# Allegro board MK60_88E6071_TEST_V10A.brd
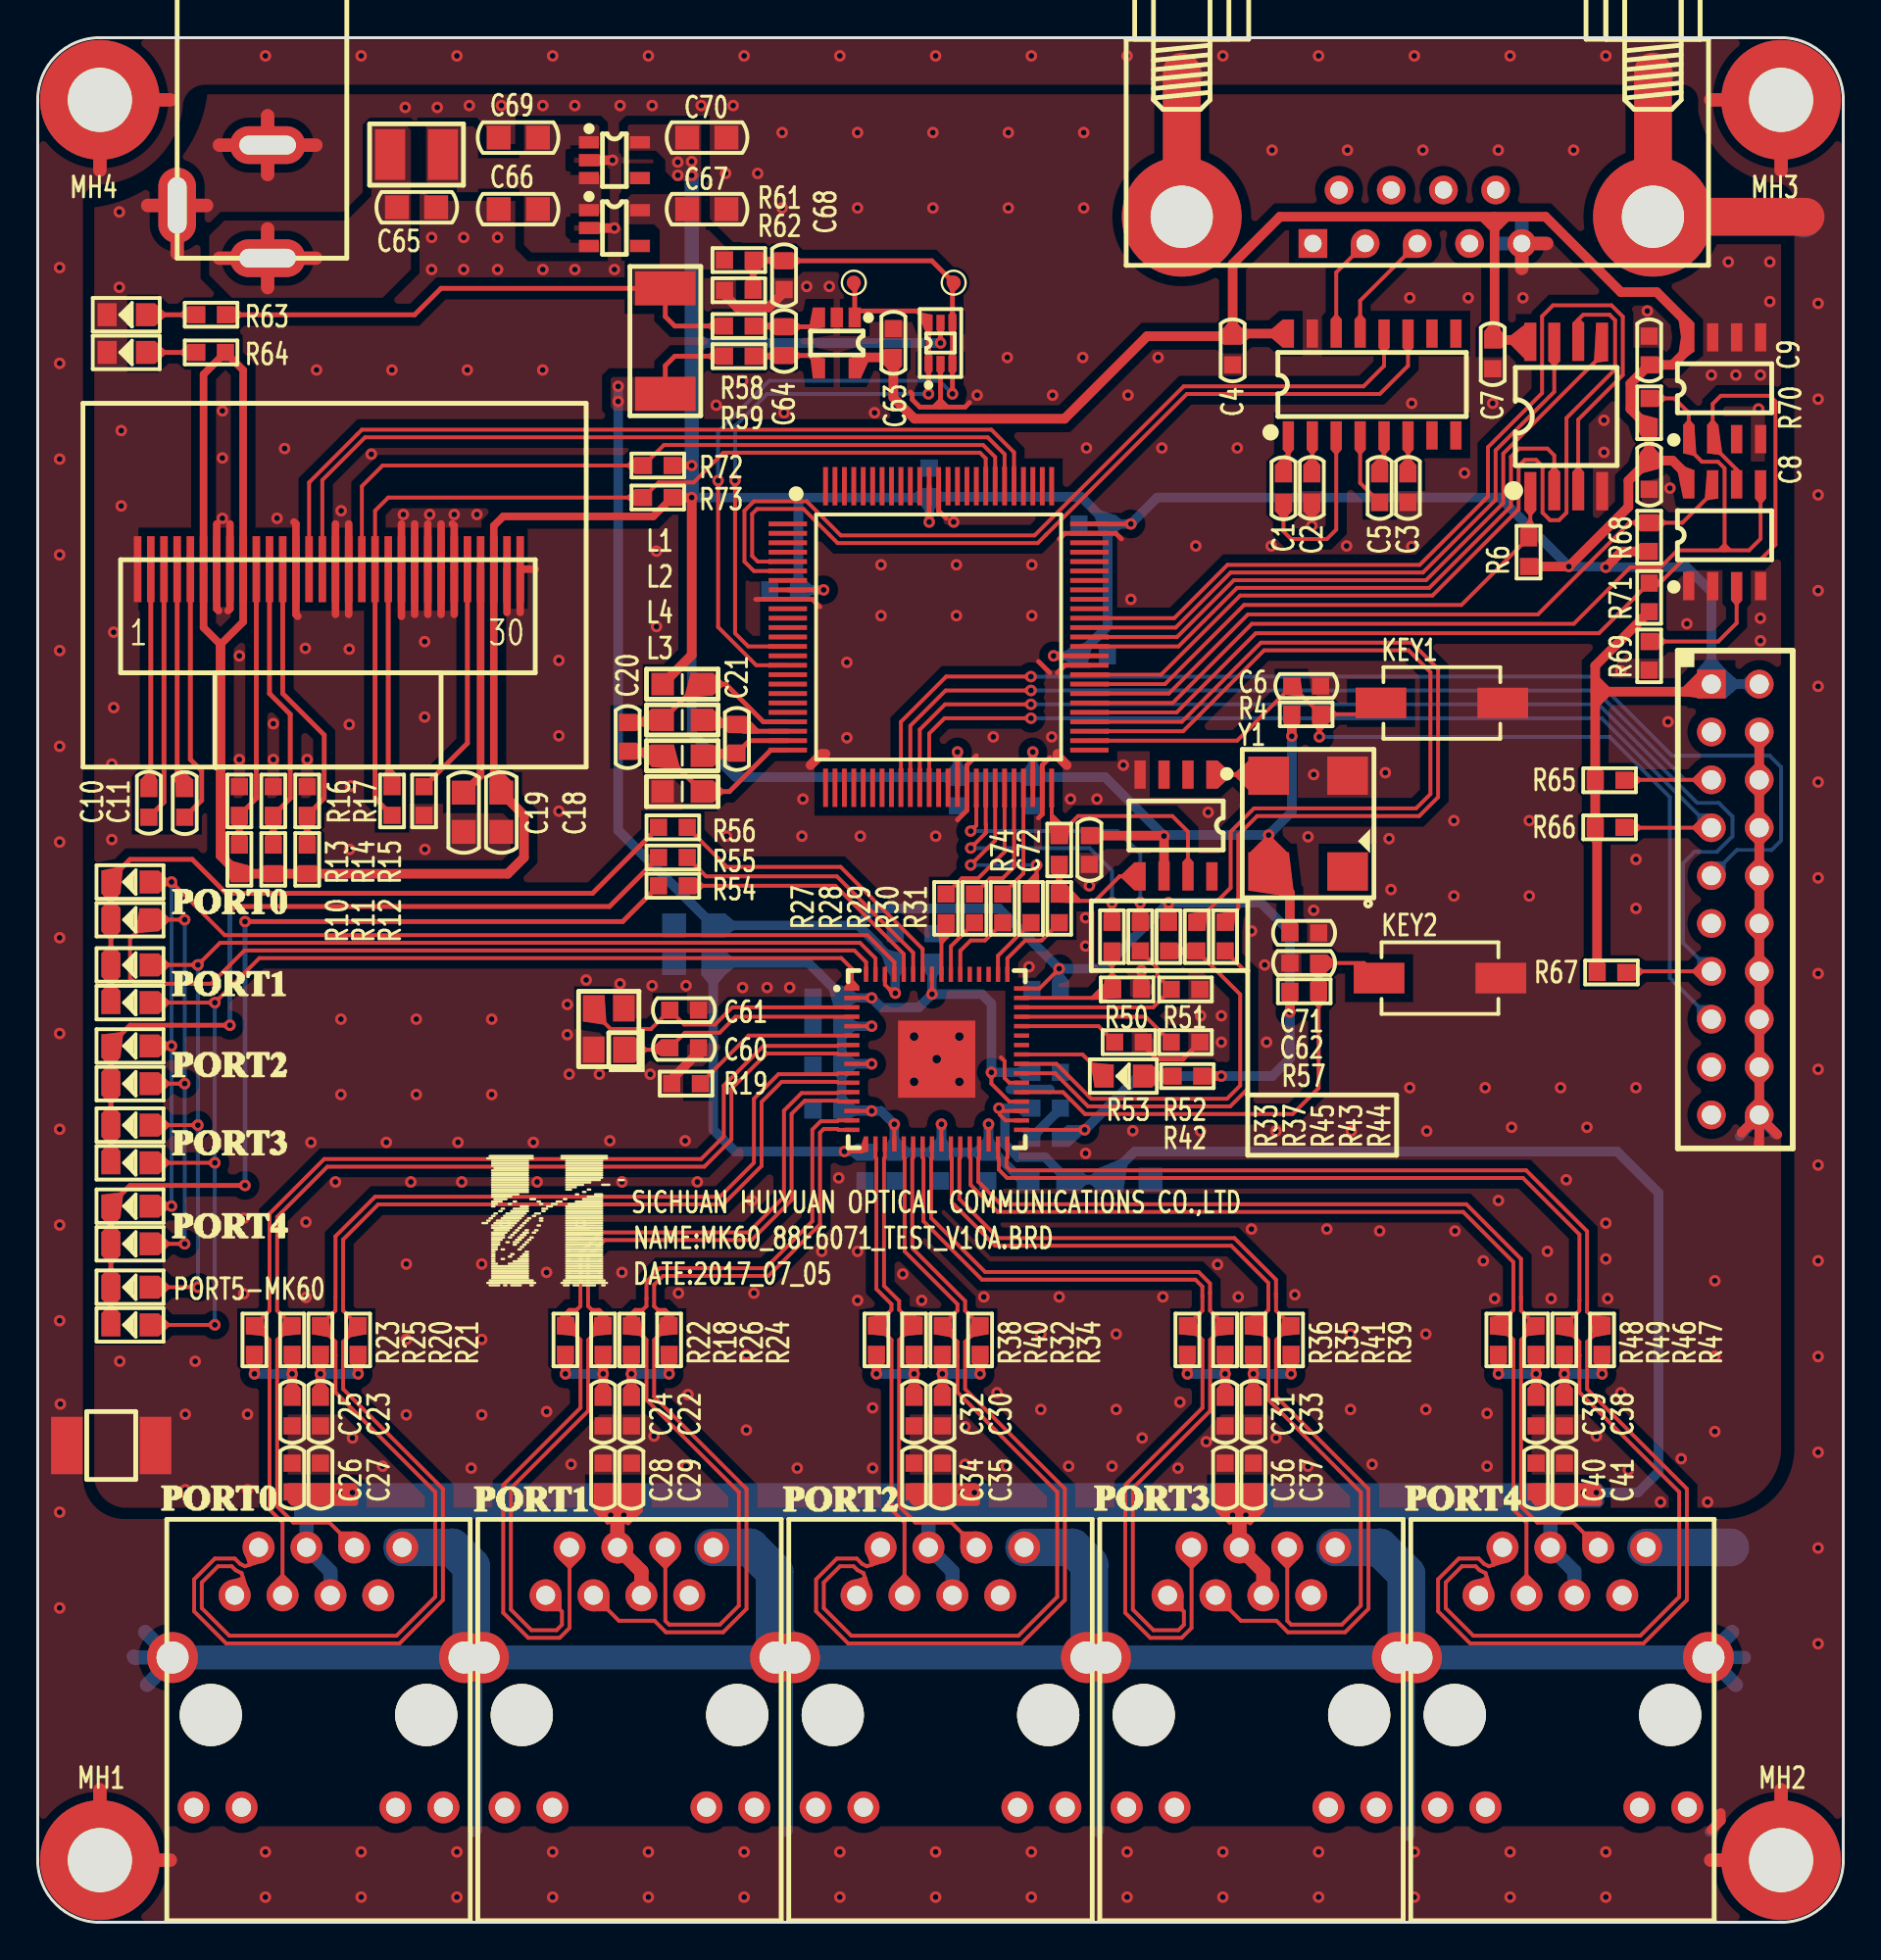
[diagram p0: board, top side]
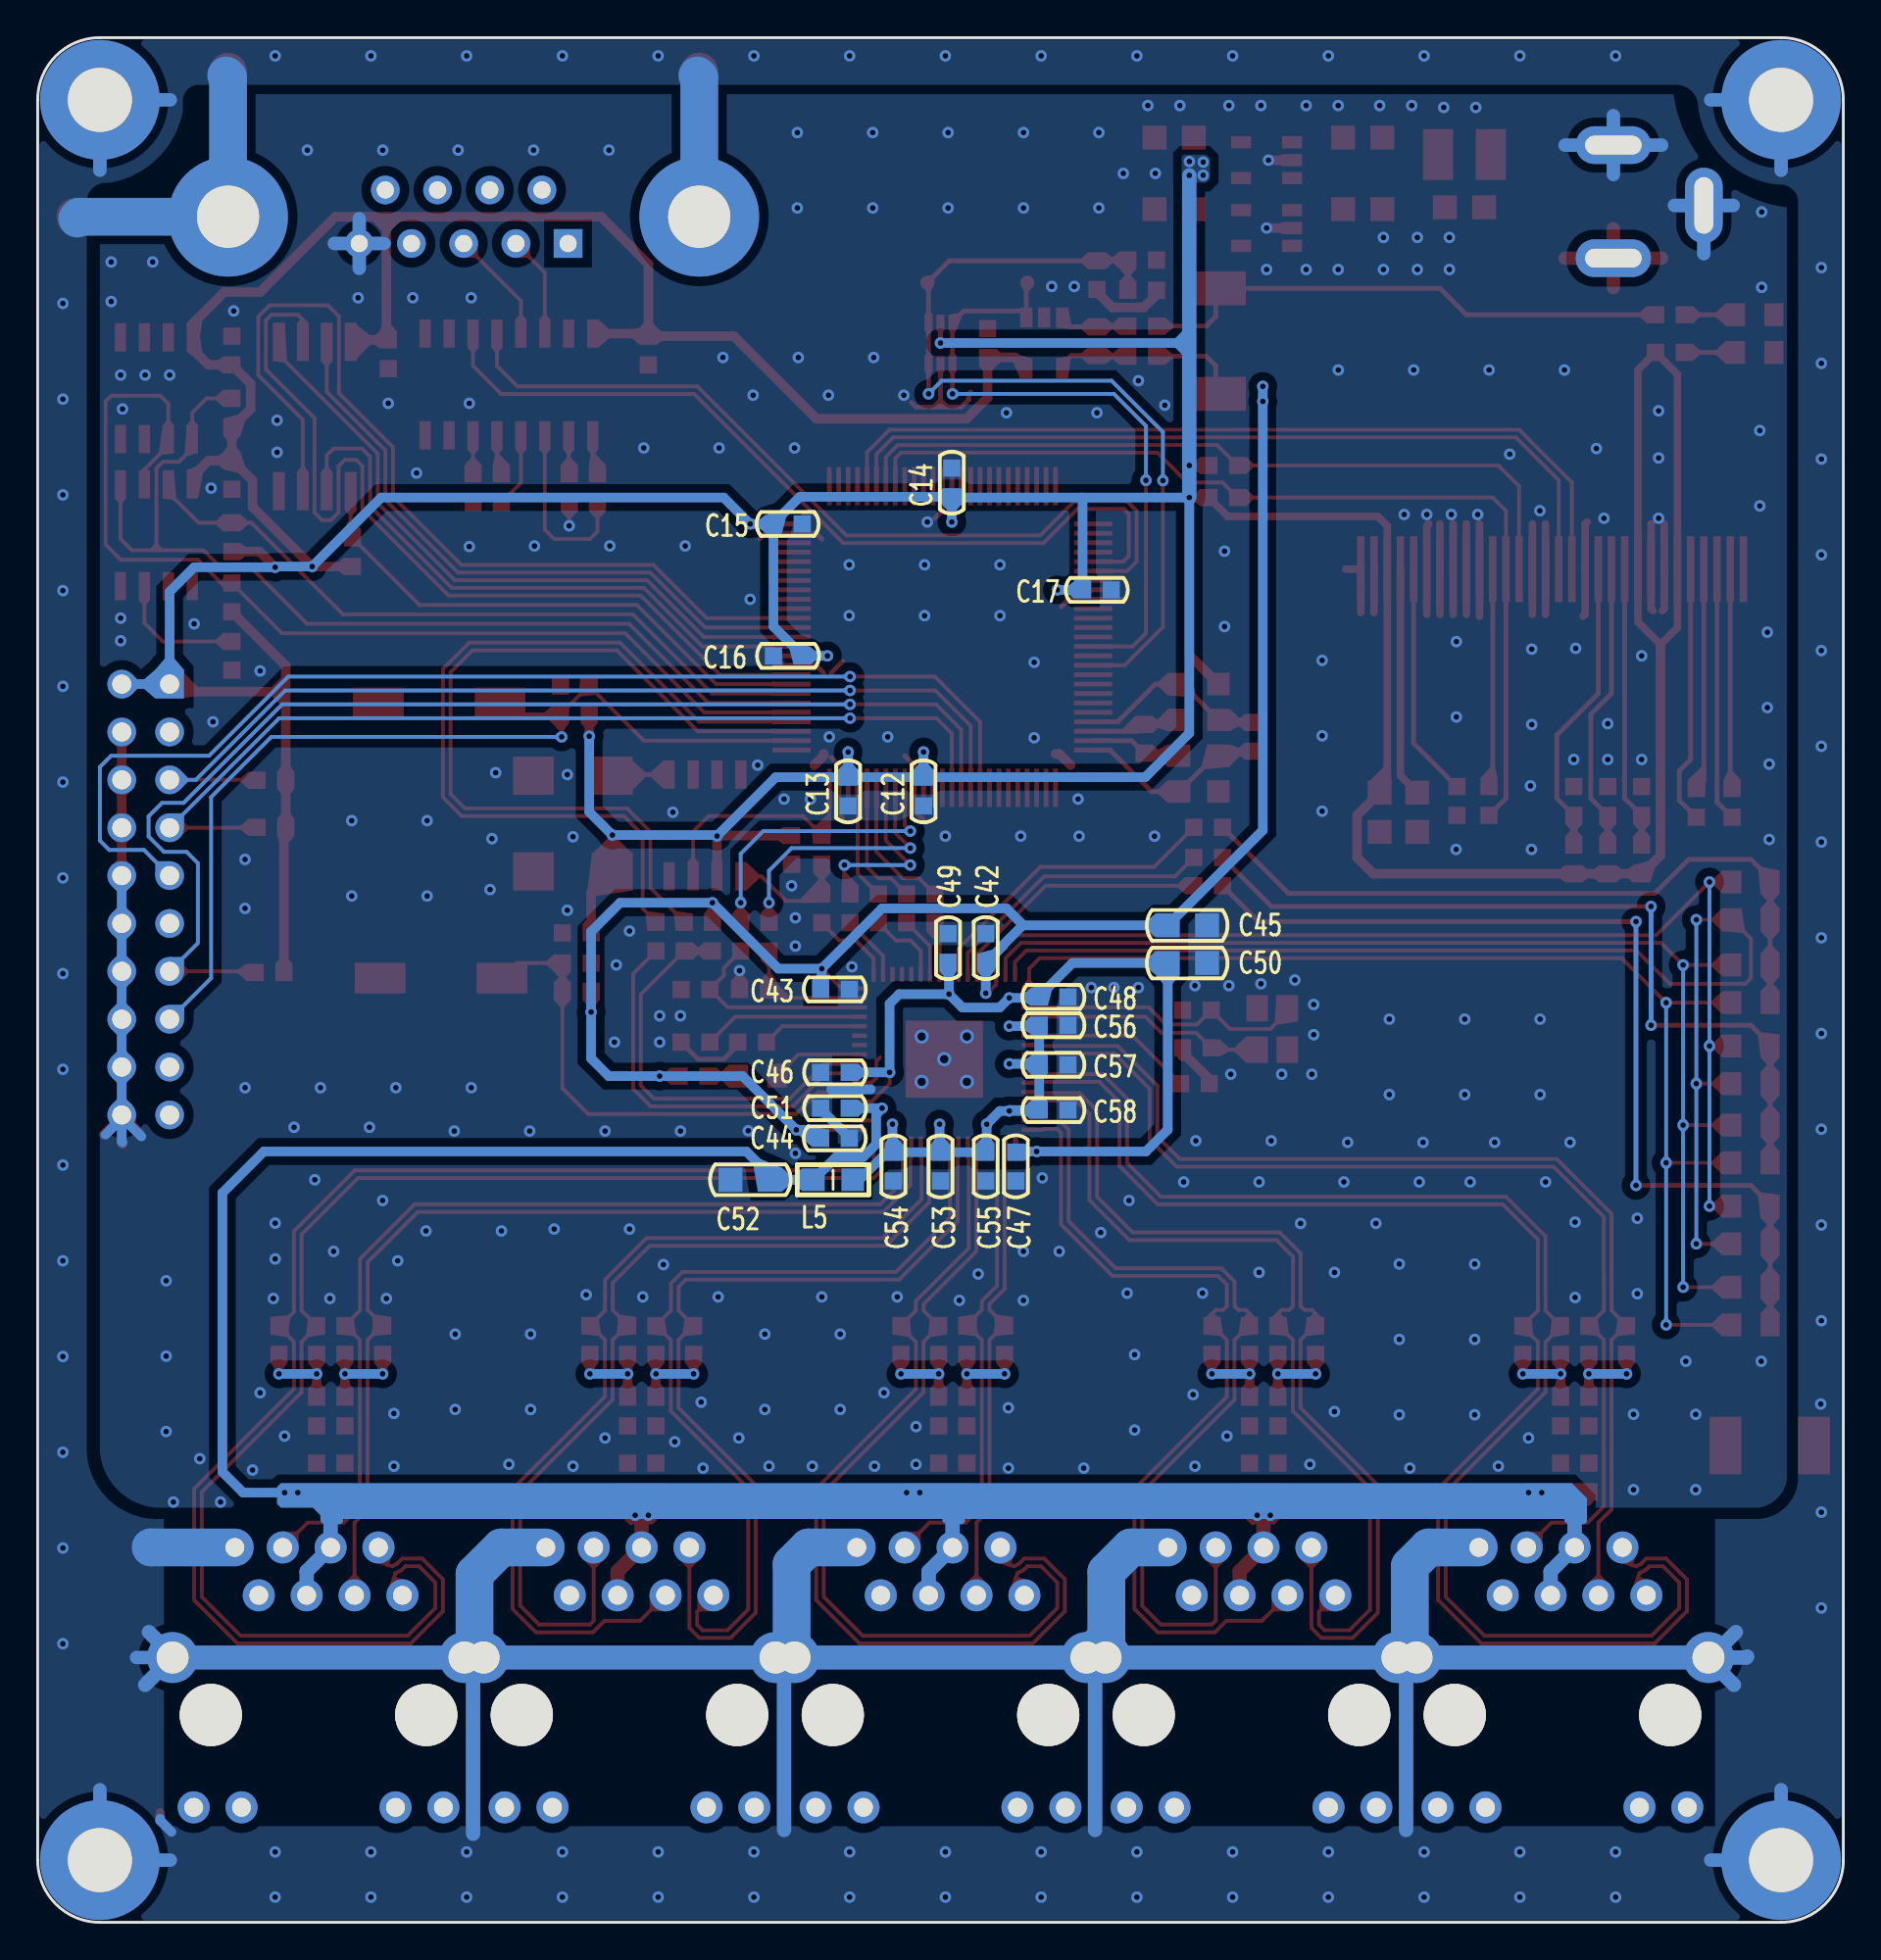
[diagram p1: board, bottom side, seen from below]

Outline 95.8 x 100 mm; copper layers: TOP, BOTTOM. Coordinates in mm from the lower left corner of the outline.
Outline path: 0,96.7 0,3.3 arc(0.97,0.97) 3.3,0 92.5,0 arc(94.83,0.97) 95.8,3.3 95.8,96.7 arc(94.83,99.03) 92.5,100 3.3,100 arc(0.97,99.03) 0,96.7

## Design rules (mm)
net group DP1: nets RXN0 RXP0
net group DP2: nets RXN1 RXP1
net group DP3: nets RXN2 RXP2
net group DP4: nets RXN3 RXP3
net group DP5: nets RXN4 RXP4
net group DP6: nets TXN0 TXP0
net group DP7: nets TXN1 TXP1
net group DP8: nets TXN2 TXP2
net group DP9: nets TXN3 TXP3
net group DP10: nets TXN4 TXP4

## Placement (name value [footprint] x y rotation side)
C1  0.1uF_50V  [CC0603]  66.1 76.1 270 top
C2  0.1uF_50V  [CC0603]  67.6 76.1 90 top
C3  0.1uF_50V  [CC0603]  72.7 76.1 90 top
C4  0.1uF_50V  [CC0603]  63.4 83.4 90 top
C5  0.1uF_50V  [CC0603]  71.2 76.1 90 top
C6  0.1uF_50V  [CC0603]  67.3 65.6 0 top
C7  0.1uF_50V  [CC0603]  77.2 83.2 90 top
C8  0.1uF_50V  [CC0603]  85.5 76.8 90 top
C9  0.1uF_50V  [CC0603]  85.5 83.4 90 top
C10  1uF_50V  [CC0603]  5.9 59.4 90 top
C11  1uF_50V  [CC0603]  7.8 59.4 270 top
C12  0.1uF_50V  [CC0603]  48.8 60 90 bottom
C13  0.1uF_50V  [CC0603]  52.8 60 90 bottom
C14  0.1uF_50V  [CC0603]  47.3 76.4 270 bottom
C15  0.1uF_50V  [CC0603]  56 74.2 0 bottom
C16  0.1uF_50V  [CC0603]  56 67.2 180 bottom
C17  0.1uF_50V  [CC0603]  39.6 70.7 0 bottom
C18  10uF_25V  [CC0805]  24.6 58.9 270 top
C19  10uF_25V  [CC0805]  22.6 58.9 270 top
C20  0.1uF_50V  [CC0603]  31.3 62.9 270 top
C21  0.1uF_50V  [CC0603]  37.1 62.8 270 top
C22  0.1uF_50V  [CC0603]  31.5 27.1 270 top
C23  0.1uF_50V  [CC0603]  15 27.1 270 top
C24  0.1uF_50V  [CC0603]  30 27.1 270 top
C25  0.1uF_50V  [CC0603]  13.5 27.1 270 top
C26  0.1uF_50V  [CC0603]  13.5 23.6 270 top
C27  1nF_50V  [CC0603]  15 23.6 270 top
C28  0.1uF_50V  [CC0603]  30 23.6 270 top
C29  1nF_50V  [CC0603]  31.5 23.6 270 top
C30  0.1uF_50V  [CC0603]  48 27.1 270 top
C31  0.1uF_50V  [CC0603]  63 27.1 270 top
C32  0.1uF_50V  [CC0603]  46.5 27.1 270 top
C33  0.1uF_50V  [CC0603]  64.5 27.1 270 top
C34  0.1uF_50V  [CC0603]  46.5 23.6 270 top
C35  1nF_50V  [CC0603]  48 23.6 270 top
C36  0.1uF_50V  [CC0603]  63 23.6 270 top
C37  1nF_50V  [CC0603]  64.5 23.6 270 top
C38  0.1uF_50V  [CC0603]  81 27.1 270 top
C39  0.1uF_50V  [CC0603]  79.5 27.1 270 top
C40  0.1uF_50V  [CC0603]  79.5 23.6 270 top
C41  1nF_50V  [CC0603]  81 23.6 270 top
C42  0.1uF_50V  [CC0603]  45.5 51.7 270 bottom
C43  0.1uF_50V  [CC0603]  53.5 49.5 0 bottom
C44  0.1uF_50V  [CC0603]  53.5 41.6 0 bottom
C45  10uF_25V  [CC0805]  34.8 52.9 0 bottom
C46  0.1uF_50V  [CC0603]  53.5 45.1 180 bottom
C47  0.1uF_50V  [CC0603]  43.9 40.1 90 bottom
C48  0.1uF_50V  [CC0603]  41.9 49.1 0 bottom
C49  0.1uF_50V  [CC0603]  47.5 51.7 270 bottom
C50  10uF_25V  [CC0805]  34.8 50.9 0 bottom
C51  0.1uF_50V  [CC0603]  53.5 43.2 180 bottom
C52  10uF_25V  [CC0805]  58 39.4 180 bottom
C53  0.1uF_50V  [CC0603]  47.9 40.1 90 bottom
C54  0.1uF_50V  [CC0603]  50.4 40.1 90 bottom
C55  0.1uF_50V  [CC0603]  45.5 40.1 90 bottom
C56  0.1uF_50V  [CC0603]  41.9 47.6 0 bottom
C57  0.1uF_50V  [CC0603]  41.9 45.5 0 bottom
C58  0.1uF_50V  [CC0603]  41.9 43.1 0 bottom
C60  20pF_50V  [CC0603]  34.3 46.4 180 top
C61  20pF_50V  [CC0603]  34.3 48.4 180 top
C62  470pF_50V  [CC0603]  67.2 50.9 180 top
C63  0.1uF_50V  [CC0603]  45.4 83.8 90 top
C64  0.1uF_50V  [CC0603]  39.6 83.9 90 top
C65  10uF_25V  [CC0805]  20.1 91 0 top
C66  10uF_25V  [CC0805]  25.5 90.9 180 top
C67  10uF_25V  [CC0805]  35.5 90.9 0 top
C68  0.1uF_50V  [CC0603]  39.6 87.4 270 top
C69  10uF_25V  [CC0805]  25.5 94.7 180 top
C70  10uF_25V  [CC0805]  35.5 94.7 0 top
C71  0.1uF_50V  [CC0603]  67.2 52.5 180 top
C72  0.1uF_50V  [CC0603]  55.8 56.9 90 top
D1  LED_GREEN  [LED0805]  57.6 44.9 180 top
D2  LED_GREEN  [LED0805]  4.9 53.2 180 top
D3  LED_GREEN  [LED0805]  4.9 48.8 180 top
D4  LED_GREEN  [LED0805]  4.9 44.5 180 top
D5  LED_GREEN  [LED0805]  4.9 40.3 180 top
D6  LED_GREEN  [LED0805]  4.9 36 180 top
D7  LED_GREEN  [LED0805]  4.9 31.7 180 top
D8  LED_GREEN  [LED0805]  4.9 55.2 180 top
D9  LED_GREEN  [LED0805]  4.9 50.8 180 top
D10  LED_GREEN  [LED0805]  4.9 46.5 180 top
D11  LED_GREEN  [LED0805]  4.9 42.3 180 top
D12  LED_GREEN  [LED0805]  4.9 38 180 top
D13  LED_GREEN  [LED0805]  4.9 33.7 180 top
D14  LED_GREEN  [LED0805]  4.7 85.3 180 top
D15  LED_GREEN  [LED0805]  4.7 83.3 180 top
DC1  -  [DC005]  12.2 94.3 270 top
F1  SMD1210-6V2A  [SMD-1210]  20.1 93.8 0 top
FB1  FBMH4532HM132-T  [L1812]  3.9 25.3 0 top
J1  -  [HEADER10X2_2R54]  88.8 65.7 270 top
J2  -  [DB9-F]  73.2 90.5 0 top
J3  -  [HR911105A]  14.9 11 180 top
J4  -  [HR911105A]  31.4 11 180 top
J5  -  [HR911105A]  64.4 11 180 top
J6  -  [HR911105A]  47.9 11 180 top
J7  -  [HR911105A]  80.9 11 180 top
KEY1  KEY  [KEY_SMD_2]  74.5 64.7 0 top
KEY2  KEY  [KEY_SMD_2]  74.4 50.1 0 top
L1  BEAD_BLM21PG600  [LC0805]  34.2 65.7 0 top
L2  BEAD_BLM21PG600  [LC0805]  34.2 63.8 0 top
L3  BEAD_BLM21PG600  [LC0805]  34.2 60 0 top
L4  BEAD_BLM21PG600  [LC0805]  34.2 61.9 0 top
L5  BEAD_BLM21PG600  [LC0805]  53.6 39.4 180 bottom
MH1  HOLD-M3  [HOLD250D134]  3.3 3.3 0 top
MH2  HOLD-M3  [HOLD250D134]  92.5 3.3 0 top
MH3  HOLD-M3  [HOLD250D134]  92.5 96.7 0 top
MH4  HOLD-M3  [HOLD250D134]  3.3 96.7 0 top
NOREF  -  []  0 0 90 top
NOREF#2  -  []  0 0 0 top
NOREF#3  -  []  0 0 0 top
NOREF#4  -  []  0 0 90 top
NOREF#5  -  []  0 0 90 top
NOREF#6  -  []  0 0 0 top
R4  10K  [RC0603]  67.3 64.1 0 top
R6  10K  [RC0603]  79.1 72.7 90 top
R10  0R/NI  [RC0603]  10.7 56.4 270 top
R11  0R  [RC0603]  12.5 56.4 270 top
R12  0R/NI  [RC0603]  14.3 56.4 270 top
R13  0R  [RC0603]  10.7 59.5 270 top
R14  0R/NI  [RC0603]  12.5 59.5 270 top
R15  0R  [RC0603]  14.3 59.5 270 top
R16  0R  [RC0603]  18.8 59.5 90 top
R17  390K  [RC0603]  20.5 59.5 90 top
R18  49.9R  [RC0603]  30 30.9 90 top
R19  4.99K  [RC0603]  34.4 44.5 0 top
R20  49.9R  [RC0603]  15 30.9 90 top
R21  49.9R  [RC0603]  17 30.9 90 top
R22  49.9R  [RC0603]  28 30.9 90 top
R23  49.9R  [RC0603]  11.5 30.9 90 top
R24  49.9R  [RC0603]  33.5 30.9 90 top
R25  49.9R  [RC0603]  13.5 30.9 90 top
R26  49.9R  [RC0603]  31.5 30.9 90 top
R27  20R  [RC0603]  48.2 53.8 90 top
R28  20R  [RC0603]  49.7 53.8 90 top
R29  20R  [RC0603]  51.2 53.8 90 top
R30  20R  [RC0603]  52.7 53.8 90 top
R31  20R  [RC0603]  54.2 53.8 90 top
R32  49.9R  [RC0603]  48 30.9 90 top
R33  20R  [RC0603]  57 52.3 90 top
R34  49.9R  [RC0603]  50 30.9 90 top
R35  49.9R  [RC0603]  63 30.9 90 top
R36  49.9R  [RC0603]  61 30.9 90 top
R37  20R  [RC0603]  58.5 52.3 90 top
R38  49.9R  [RC0603]  44.5 30.9 90 top
R39  49.9R  [RC0603]  66.5 30.9 90 top
R40  49.9R  [RC0603]  46.5 30.9 90 top
R41  49.9R  [RC0603]  64.5 30.9 90 top
R42  150R  [RC0603]  61 44.9 0 top
R43  20R  [RC0603]  61.5 52.3 90 top
R44  20R  [RC0603]  63 52.3 90 top
R45  10K  [RC0603]  60 52.3 90 top
R46  49.9R  [RC0603]  81 30.9 90 top
R47  49.9R  [RC0603]  83 30.9 90 top
R48  49.9R  [RC0603]  77.5 30.9 90 top
R49  49.9R  [RC0603]  79.5 30.9 90 top
R50  4.7K/NI  [RC0603]  57.8 49.5 0 top
R51  4.7K/NI  [RC0603]  60.9 49.5 0 top
R52  4.7K  [RC0603]  60.9 46.7 0 top
R53  4.7K/NI  [RC0603]  57.9 46.7 0 top
R54  150R  [RC0603]  33.7 55 180 top
R55  150R  [RC0603]  33.7 56.5 180 top
R56  150R  [RC0603]  33.7 58.1 180 top
R57  5.9K  [RC0603]  67.2 49.4 0 top
R58  10R  [RC0603]  37.2 84.7 180 top
R59  10R  [RC0603]  37.2 83.1 180 top
R60  0R47  [RC2512]  33.3 83.9 90 top
R61  110K  [RC0603]  37.2 88.2 180 top
R62  220K  [RC0603]  37.2 86.6 0 top
R63  2K  [RC0603]  9.2 85.3 0 top
R64  2K  [RC0603]  9.2 83.3 0 top
R65  10K  [RC0603]  83.4 60.6 0 top
R66  10K  [RC0603]  83.4 58.1 0 top
R67  10K  [RC0603]  83.5 50.4 0 top
R68  10K  [RC0603]  85.5 73.5 270 top
R69  0R  [RC0603]  85.5 67.2 90 top
R70  4.7K  [RC0603]  85.5 80.1 90 top
R71  4.7K  [RC0603]  85.5 70.3 90 top
R72  4.7K  [RC0603]  32.9 77.3 180 top
R73  4.7K  [RC0603]  32.9 75.6 180 top
R74  0R  [RC0603]  54.2 56.9 270 top
TP1  TestPoint  [TP-0R75]  43.3 87 0 top
TP2  TestPoint  [TP-0R75]  48.6 87 0 top
U1  MAX3232ESE+  [SOIC16]  70.8 81.6 0 top
U2  MK60DN512VLL10  [LQFP-100]  47.8 68.2 0 top
U3  AT24C512C-SSHM-T/NI  [SOIC8]  89.5 73.6 0 top
U4  W25Q128FVSIG  [SOIC-8_208]  81.1 79.9 0 top
U5  TMP75AIDR  [SOIC8]  89.5 81.4 0 top
U6  -  [OLED_0R96]  2.4 61.3 0 top
U7  88E6071-xx-NNC2I000  [QFN-64]  47.7 45.8 270 top
U8  X322525MSB4SI  [X-4P-3R2X2R5-SMD]  30.3 47.4 90 top
U9  INA193AIDBVT  [SOT23-5]  42.4 83.8 180 top
U10  NUP4202W1T2G  [SC-88]  47.9 83.8 90 top
U11  SPX3819M5-L-3-3/TR  [SOT23-5]  30.6 89.9 270 top
U12  SPX3819M5-L-3-3/TR  [SOT23-5]  30.6 93.5 270 top
U13  CY2305SXI-1HT/NI  [SOIC8]  60.4 58.2 180 top
Y1  SG7050CAN-50M-TJGA/NI  [OSC7X5]  67.4 58.3 90 top

## Library data of the parts
C1-C6 C62 = CAP NP
C7-C58 C60 C61 C63-C72 = CAP NP_2
D1-D15 = LED_4
DC1 = DC005
F1 = FUSE
FB1 = FB
J1 = CON20_0
J2 = DB9-F_0
J3-J7 = CON_RJ45_1X8_F_RA_0
KEY1 KEY2 = SW PUSHBUTTON_0
L1-L5 = IND_BEAD_0805_600OHM_1
MH1-MH4 = Hold_1
R4 R6 R10-R74 = R_Generic
TP1 TP2 = TestPoint
U1 = ADM202_0
U2 = MK60DN512VLL10_4
U3 = TMP_0
U4 = CEIT_C5000_0
U5 = TMP75AIDR_0
U6 = OLED_0
U7 = 88E6071-xx-NNC2I000
U8 = TSX-3225
U9 = 74AHC1G08_1
U10 = nup2202w1_D_2
U11 U12 = SPX3819M5-L-1-2
U13 = CY2305C_0
Y1 = SMD_OSC_5

## Footprints (pads in the part's own frame, mm; a bottom-side part is the same pattern mirrored in y, then rotated)
CC0603
  rect 0.914x0.914 smd: 1(-0.762,0) 2(0.762,0)
CC0805
  rect 1.27x1.27 smd: 1(-1.041,0) 2(1.041,0)
DB9-F
  rect 1.524x1.524 hole 0.914: 1(-5.54,-1.42)
  round 1.524 hole 0.914: 2(-2.77,-1.42) 3(0,-1.42) 4(2.77,-1.42) 5(5.54,-1.42) 6(-4.155,1.42) 7(-1.385,1.42) 8(1.385,1.42) 9(4.155,1.42)
  round 6.35 hole 3.302: 10(12.5,0) 11(-12.5,0)
DC005
  oval 2x4 hole 1x3: 1(6,0) 2(0,0)
  oval 4x2 hole 3x1: 3(3.2,-4.8)
HEADER10X2_2R54
  rect 1.524x1.524 hole 1.016: 1(0,0)
  round 1.524 hole 1.016: 2(0,2.54) 3(2.54,0) 4(2.54,2.54) 5(5.08,0) 6(5.08,2.54) 7(7.62,0) 8(7.62,2.54) 9(10.16,0) 10(10.16,2.54) 11(12.7,0) 12(12.7,2.54) 13(15.24,0) 14(15.24,2.54) 15(17.78,0) 16(17.78,2.54) 17(20.32,0) 18(20.32,2.54) 19(22.86,0) 20(22.86,2.54)
HOLD250D134
  round 6.35 hole 3.404: 1(0,0)
HR911105A
  round 3.3 hole 3.3 unplated: (-5.715,0) (5.715,0)
  round 1.699 hole 1.001: 1(4.45,-6.35) 2(3.18,-8.89) 3(1.91,-6.35) 4(0.64,-8.89) 5(-0.63,-6.35) 6(-1.9,-8.89) 7(-3.17,-6.35) 8(-4.44,-8.89) 9(6.625,4.9) 10(4.085,4.9) 11(-4.085,4.9) 12(-6.625,4.9)
  round 2.7 hole 1.7: 13(7.745,-3.05) 14(-7.745,-3.05)
KEY_SMD_2
  rect 2.692x1.626 smd: 1(-3.23,0) 2(3.23,0)
L1812
  rect 1.676x3.048 smd: 1(-2.349,0) 2(2.349,0)
LC0805
  rect 1.194x1.194 smd: 1(-1.041,0) 2(1.041,0)
LED0805
  rect 1.016x1.219 smd: 1(-1.016,0) 2(1.016,0)
LQFP-100
  rect 2.032x0.254 smd: 1(-8,6) 2(-8,5.5) 3(-8,5) 4(-8,4.5) 5(-8,4) 6(-8,3.5) 7(-8,3) 8(-8,2.5) 9(-8,2) 10(-8,1.5) 11(-8,1) 12(-8,0.5) 13(-8,0) 14(-8,-0.5) 15(-8,-1) 16(-8,-1.5) 17(-8,-2) 18(-8,-2.5) 19(-8,-3) 20(-8,-3.5) 21(-8,-4) 22(-8,-4.5) 23(-8,-5) 24(-8,-5.5) 25(-8,-6) 51(8,-6) 52(8,-5.5) 53(8,-5) 54(8,-4.5) 55(8,-4) 56(8,-3.5) 57(8,-3) 58(8,-2.5) 59(8,-2) 60(8,-1.5) 61(8,-1) 62(8,-0.5) 63(8,0) 64(8,0.5) 65(8,1) 66(8,1.5) 67(8,2) 68(8,2.5) 69(8,3) 70(8,3.5) 71(8,4) 72(8,4.5) 73(8,5) 74(8,5.5) 75(8,6)
  rect 0.254x2.032 smd: 26(-6,-8) 27(-5.5,-8) 28(-5,-8) 29(-4.5,-8) 30(-4,-8) 31(-3.5,-8) 32(-3,-8) 33(-2.5,-8) 34(-2,-8) 35(-1.5,-8) 36(-1,-8) 37(-0.5,-8) 38(0,-8) 39(0.5,-8) 40(1,-8) 41(1.5,-8) 42(2,-8) 43(2.5,-8) 44(3,-8) 45(3.5,-8) 46(4,-8) 47(4.5,-8) 48(5,-8) 49(5.5,-8) 50(6,-8) 76(6,8) 77(5.5,8) 78(5,8) 79(4.5,8) 80(4,8) 81(3.5,8) 82(3,8) 83(2.5,8) 84(2,8) 85(1.5,8) 86(1,8) 87(0.5,8) 88(0,8) 89(-0.5,8) 90(-1,8) 91(-1.5,8) 92(-2,8) 93(-2.5,8) 94(-3,8) 95(-3.5,8) 96(-4,8) 97(-4.5,8) 98(-5,8) 99(-5.5,8) 100(-6,8)
OLED_0R96
  rect 0.4x3.5 smd: 1(2.9,10.5) 2(3.6,10.5) 3(4.3,10.5) 4(5,10.5) 5(5.7,10.5) 6(6.4,10.5) 7(7.1,10.5) 8(7.8,10.5) 9(8.5,10.5) 10(9.2,10.5) 11(9.9,10.5) 12(10.6,10.5) 13(11.3,10.5) 14(12,10.5) 15(12.7,10.5) 16(13.4,10.5) 17(14.1,10.5) 18(14.8,10.5) 19(15.5,10.5) 20(16.2,10.5) 21(16.9,10.5) 22(17.6,10.5) 23(18.3,10.5) 24(19,10.5) 25(19.7,10.5) 26(20.4,10.5) 27(21.1,10.5) 28(21.8,10.5) 29(22.5,10.5) 30(23.2,10.5)
OSC7X5
  rect 2.032x2.159 smd: 1(-2.54,-2.1) 2(2.54,-2.1) 3(2.54,2.091) 4(-2.54,2.091)
QFN-64
  rect 0.23x0.8 smd: 1(-3.75,-4.5) 2(-3.25,-4.5) 3(-2.75,-4.5) 4(-2.25,-4.5) 5(-1.75,-4.5) 6(-1.25,-4.5) 7(-0.75,-4.5) 8(-0.25,-4.5) 9(0.25,-4.5) 10(0.75,-4.5) 11(1.25,-4.5) 12(1.75,-4.5) 13(2.25,-4.5) 14(2.75,-4.5) 15(3.25,-4.5) 16(3.75,-4.5) 33(3.75,4.5) 34(3.25,4.5) 35(2.75,4.5) 36(2.25,4.5) 37(1.75,4.5) 38(1.25,4.5) 39(0.75,4.5) 40(0.25,4.5) 41(-0.25,4.5) 42(-0.75,4.5) 43(-1.25,4.5) 44(-1.75,4.5) 45(-2.25,4.5) 46(-2.75,4.5) 47(-3.25,4.5) 48(-3.75,4.5)
  rect 0.8x0.23 smd: 17(4.5,-3.75) 18(4.5,-3.25) 19(4.5,-2.75) 20(4.5,-2.25) 21(4.5,-1.75) 22(4.5,-1.25) 23(4.5,-0.75) 24(4.5,-0.25) 25(4.5,0.25) 26(4.5,0.75) 27(4.5,1.25) 28(4.5,1.75) 29(4.5,2.25) 30(4.5,2.75) 31(4.5,3.25) 32(4.5,3.75) 49(-4.5,3.75) 50(-4.5,3.25) 51(-4.5,2.75) 52(-4.5,2.25) 53(-4.5,1.75) 54(-4.5,1.25) 55(-4.5,0.75) 56(-4.5,0.25) 57(-4.5,-0.25) 58(-4.5,-0.75) 59(-4.5,-1.25) 60(-4.5,-1.75) 61(-4.5,-2.25) 62(-4.5,-2.75) 63(-4.5,-3.25) 64(-4.5,-3.75)
  rect 4.1x4.1 smd: 65(0,0)
RC0603
  rect 0.914x0.914 smd: 1(-0.762,0) 2(0.762,0)
RC2512
  rect 1.8x3.2 smd: 1(-2.8,0) 2(2.8,0)
SC-88
  rect 0.813x0.432 smd: 1(-1.092,0.635) 2(-1.092,0) 3(-1.092,-0.635) 4(1.092,-0.635) 5(1.092,0) 6(1.092,0.635)
SMD-1210
  rect 1.6x2.7 smd: 1(-1.4,0) 2(1.4,0)
SOIC8
  rect 0.6x1.5 smd: 1(-1.9,-2.7) 2(-0.63,-2.7) 3(0.64,-2.7) 4(1.91,-2.7) 5(1.91,2.7) 6(0.64,2.7) 7(-0.63,2.7) 8(-1.9,2.7)
SOIC16
  rect 0.6x1.5 smd: 1(-4.445,-2.7) 2(-3.175,-2.7) 3(-1.905,-2.7) 4(-0.635,-2.7) 5(0.635,-2.7) 6(1.905,-2.7) 7(3.175,-2.7) 8(4.445,-2.7) 9(4.445,2.7) 10(3.175,2.7) 11(1.905,2.7) 12(0.635,2.7) 13(-0.635,2.7) 14(-1.905,2.7) 15(-3.175,2.7) 16(-4.445,2.7)
SOIC-8_208
  rect 0.635x2.032 smd: 1(-1.905,-3.962) 2(-0.635,-3.962) 3(0.635,-3.962) 4(1.905,-3.962) 5(1.905,3.962) 6(0.635,3.962) 7(-0.635,3.962) 8(-1.905,3.962)
SOT23-5
  rect 0.65x1.06 smd: 1(-0.95,-1.354) 2(0,-1.354) 3(0.95,-1.354) 4(0.95,1.354) 5(-0.95,1.354)
TP-0R75
  round 0.75 smd: 1(0,0)
X-4P-3R2X2R5-SMD
  rect 1.4x1.15 smd: 1(-1.1,-0.8) 2(1.1,-0.8) 3(1.1,0.8) 4(-1.1,0.8)

## Nets
GND: C2.1 C3.1 C4.1 C6.2 C7.1 C8.1 C9.2 C12.1 C13.1 C14.1 C15.1 C16.1 C17.1 C18.2 C19.2 C22.2 C23.2 C24.2 C25.2 C26.1 C27.1 C28.1 C29.1 C30.2 C31.2 C32.2 C33.2 C34.1 C35.1 C36.1 C37.1 C38.2 C39.2 C40.1 C41.1 C42.1 C43.1 C44.1 C45.1 C46.1 C47.1 C48.1 C49.1 C50.1 C51.1 C52.1 C53.1 C54.1 C55.1 C56.1 C57.1 C58.1 C60.1 C61.1 C62.2 C63.2 C65.2 C66.2 C67.2 C68.2 C69.2 C70.2 C71.1 C72.1 D14.2(CATHODE) D15.2(CATHODE) DC1.2 DC1.3 FB1.2 J1.4 J1.6 J1.8 J1.10 J1.12 J1.14 J1.16 J1.18 J1.20 J2.5 KEY1.2 KEY2.2 L3.1(A) R13.1 R14.1 R15.1 R17.1 R19.1 R50.2 R51.2 R52.2 R53.2 R62.1 R69.1 U1.15(GND) U2.9(VSS_1) U2.41(VSS_2) U2.49(VSS_3) U2.60(VSS_4) U2.74(VSS_5) U2.88(VSS_6) U3.1(A0) U3.2(A1) U3.4(GND) U4.4(GND) U5.4(GND) U5.5(A2) U5.6(A1) U5.7(A0) U6.1(NC(GND)_1) U6.7(NC) U6.8(VSS) U6.13(CS#) U6.16(R/W#) U6.17(E/RD#) U6.21(D3) U6.22(D4) U6.23(D5) U6.24(D6) U6.25(D7) U6.29(VLSS) U6.30(NC(GND)_2) U7.38(VSS) U7.65(GND) U8.2(GND1) U8.4(GND2) U9.2(GND) U10.2 U11.2(GND) U12.2(GND) U13.4(GND) Y1.2(GND)
GND_EARTH: FB1.1 J2.10 J2.11 J3.8 J3.13(EG2) J3.14(EG1) J4.8 J4.13(EG2) J4.14(EG1) J5.8 J5.13(EG2) J5.14(EG1) J6.8 J6.13(EG2) J6.14(EG1) J7.8 J7.13(EG2) J7.14(EG1) MH1.1 MH2.1 MH3.1 MH4.1
VCC_3.3V: C4.2 C7.2 C8.2 C9.1 C12.2 C13.2 C14.2 C15.2 C16.2 C17.2 C18.1 C63.1 C70.1 C71.2 C72.2 J1.1 J1.2 L1.1(A) R4.1 R6.1 R10.2 R11.2 R12.2 R64.2 R65.1 R66.1 R67.1 R68.2 R70.1 R71.1 R72.1 R73.1 U1.16(VCC) U2.8(VDD_1) U2.40(VDD_2) U2.48(VDD_3) U2.61(VDD_4) U2.75(VDD_5) U2.89(VDD_6) U3.8(VCC) U4.8(VCC) U5.8(V+) U6.6(VBAT) U6.9(VDD) U6.28(VCC) U9.5(V+) U10.5 U12.5(VOUT) U13.6(VDD) Y1.4(VCC)
VCC_3.3V_OUT: C67.1 R58.2 R60.2 R61.2 R63.2 U11.5(VOUT)
VCC_3.3V_SWITCH: C42.2 C43.2 C44.2 C45.2 R42.2 R45.2 R57.1 R59.2 R60.1 U7.33(VDD33) U7.48(P5_VDDO) U7.62(EE_VDDO)
VCC_5V: C65.1 DC1.1 F1.1
VDDA3V3: C20.1 L1.2(B) L2.1(A) U2.22(VDDA)
VSSA: C20.2 L3.2(B) L4.1(A) U2.25(VSSA)
BS0: R10.1 R13.2 U6.10(BS0)
BS1: R11.1 R14.2 U6.11(BS1)
BS2: R12.1 R15.2 U6.12(BS2)
C0_LED: D8.1(ANODE) D10.1(ANODE) D12.1(ANODE) U7.61(EE_DIN/C0_LED/EEE)
C1_LED: D9.1(ANODE) D11.1(ANODE) D13.1(ANODE) U7.63(EE_CLK/C1_LED/FLOW)
C2_LED: D2.1(ANODE) D4.1(ANODE) D6.1(ANODE) U7.64(EE_CS/C2_LED/EE_WE)
C3_LED: D3.1(ANODE) D5.1(ANODE) D7.1(ANODE) U7.1(EE_DOUT/C3_LED)
CLK_50M: R31.2 R74.2 U13.5(CLK3)
CLK_50M_MK60: R74.1 U2.50(PTA18) U13.7(CLK4)
D/C#: U2.81(PTC9) U6.15(D/C#)
E6071_AVDD_1.8V: C53.2 C54.2 C55.2 C56.2 C57.2 C58.2 L5.2(B) U7.5(AVDD) U7.9(P0_AVDD) U7.14(P1_AVDD) U7.20(P2_AVDD) U7.25(P3_AVDD) U7.30(P4_AVDD)
E6071_CT_1.8V: C26.2 C27.2 C28.2 C29.2 C34.2 C35.2 C36.2 C37.2 C40.2 C41.2 C51.2 C52.2 J3.4 J3.5 J4.4 J4.5 J5.4 J5.5 J6.4 J6.5 J7.4 J7.5 L5.1(A) U7.34(VDD18(OUT)) U7.35(VDD18(IN))
E6071_VDD_CORE_1.2V: C46.2 C47.2 C48.2 C49.2 C50.2 U7.2(VDD_CORE_1) U7.17(VDD_CORE_2) U7.36(VDD_CORE(OUT&IN)) U7.57(VDD_CORE_3)
I2C0_PROT: R68.1 U2.57(PTB9) U3.7(WP)
I2C0_SCLK: R71.2 U2.55(PTB2) U3.6(SCL) U5.2(SCL)
I2C0_SDATA: R70.2 U2.56(PTB3) U3.5(SDA) U5.1(SDA)
I2C1_SCL: R72.2 U2.82(PTC10) U6.18(D0)
I2C1_SDA: R16.1 R73.2 U2.83(PTC11/LLWU_P11) U6.19(D1)
INTN: D1.2(CATHODE) U7.41(INTN)
JTAG_TCLK: J1.9 U2.34(PTA0)
JTAG_TDI: J1.5 R65.2 U2.35(PTA1)
JTAG_TDO: J1.13 R67.2 U2.36(PTA2)
JTAG_TMS: J1.7 R66.2 U2.37(PTA3)
MDC: R44.1 U7.39(MDC_CPU)
MDIO: R43.1 R45.1 U7.40(MDIO_CPU)
P5_ID0: R28.1 U7.55(P5_IND0/P5_ID0)
P5_ID1: R29.1 U7.54(P5_IND1/P5_ID1)
P5_INDV: R27.1 U7.56(P5_INDV/P5_ICTL)
P5_MODE0: R33.1 R50.1 U7.47(P5_OUTD0/P5_OD0/P5_MODE0)
P5_MODE1: R37.1 R51.1 U7.46(P5_OUTD1/P5_OD1/P5_MODE1)
P5_MODE2: R52.1 U7.45(P5_OUTD2/P6_OD0/P5_MDDE2)
P5_MODE3: R53.1 U7.44(P5_OUTD3/P6_OD1/P5_MODE3)
P5_OUTCLK: R31.1 U7.49(P5_OUTCLK/P5_REFCLK)
P5_OUTDV: R30.1 U7.50(P5_OUTEN/P5_OCTL/P5_SEL)
R0_LED: R56.1 U7.58(R0_LED/ADDR4)
R1_LED: R55.1 U7.59(R1_LED/NO_CPU)
R2_LED: R54.1 U7.60(R2_LED)
RES#: U2.80(PTC8) U6.14(RES#)
RESETN: C62.1 KEY2.1 R57.2 U7.37(RESETN)
RMII0_CRS_DV: R30.2 U2.44(PTA14)
RMII0_MDC: R44.2 U2.54(PTB1)
RMII0_MDIO: R43.2 U2.53(PTB0/LLWU_P5)
RMII0_RXD0: R33.2 U2.43(PTA13/LLWU_P4)
RMII0_RXD1: R37.2 U2.42(PTA12)
RMII0_TXD0: R28.2 U2.46(PTA16)
RMII0_TXD1: R29.2 U2.47(PTA17)
RMII0_TXEN: R27.2 U2.45(PTA15)
RXN0: J3.6(RXN1) R25.2 U7.8(P0_RXN)
RXN1: J4.6(RXN1) R26.2 U7.15(P1_RXN)
RXN2: J6.6(RXN1) R40.2 U7.19(P2_RXN)
RXN3: J5.6(RXN1) R41.2 U7.26(P3_RXN)
RXN4: J7.6(RXN1) R49.2 U7.29(P4_RXN)
RXP0: J3.3(RXP1) R23.2 U7.7(P0_RXP)
RXP1: J4.3(RXP1) R24.2 U7.16(P1_RXP)
RXP2: J6.3(RXP1) R38.2 U7.18(P2_RXP)
RXP3: J5.3(RXP1) R39.2 U7.27(P3_RXP)
RXP4: J7.3(RXP1) R48.2 U7.28(P4_RXP)
SYS_RESET#: C6.1 J1.15 KEY1.1 R4.2 U2.52(RESET_B)
TXN0: J3.2(TXN1) R21.2 U7.11(P0_TXN)
TXN1: J4.2(TXN1) R22.2 U7.12(P1_TXN)
TXN2: J6.2(TXN1) R34.2 U7.22(P2_TXN)
TXN3: J5.2(TXN1) R36.2 U7.23(P3_TXN)
TXN4: J7.2(TXN1) R47.2 U7.32(P4_TXN)
TXP0: J3.1(TXP1) R20.2 U7.10(P0_TXP)
TXP1: J4.1(TXP1) R18.2 U7.13(P1_TXP)
TXP2: J6.1(TXP1) R32.2 U7.21(P2_TXP)
TXP3: J5.1(TXP1) R35.2 U7.24(P3_TXP)
TXP4: J7.1(TXP1) R46.2 U7.31(P4_TXP)
UART3_RX: U1.12(ROUT1) U2.6(PTE5)
UART3_TX: U1.11(TIN1) U2.5(PTE4/LLWU_P2)
VCOMH: C19.1 U6.27(VCOMH)
VREFH: C21.1 L2.2(B) U2.23(VREFH)
VREFL: C21.2 L4.2(B) U2.24(VREFL)
W25B_CLK: U2.59(PTB11) U4.6(CLK)
W25B_CS#: R6.2 U2.58(PTB10) U4.1(C\S\)
W25B_DI: U2.63(PTB17) U4.5(DI)
W25B_DO: U2.62(PTB16) U4.2(DO)
W25B_HOLD#: U2.64(PTB18) U4.7(H\O\L\D\)
W25B_WP#: U2.65(PTB19) U4.3(W\P\)
WORK_CURRENT: TP1.1 U2.14(ADC0_DP1) U9.1(OUT) U10.1 U10.6
WORK_VOLTAGE: C68.1 R61.1 R62.2 TP2.1 U2.16(ADC1_DP1) U10.3 U10.4
XTAL_IN: C61.2 U7.3(XTAL_IN) U8.3(OUT2)
XTAL_OUT: C60.2 U7.4(XTAL_OUT) U8.1(OUT1)
N11720869: R69.2 U3.3(A2)
N16836550: R19.2 U7.6(IREF)
N16838678: D6.2(CATHODE) D7.2(CATHODE) D12.2(CATHODE) D13.2(CATHODE) R54.2
N16838681: D4.2(CATHODE) D5.2(CATHODE) D10.2(CATHODE) D11.2(CATHODE) R55.2
N16838688: D2.2(CATHODE) D3.2(CATHODE) D8.2(CATHODE) D9.2(CATHODE) R56.2
N16857523: C23.1 R20.1 R21.1
N16857564: C25.1 R23.1 R25.1
N16859623: C24.1 R18.1 R22.1
N16859644: C22.1 R24.1 R26.1
N16860087: C30.1 R32.1 R34.1
N16860108: C32.1 R38.1 R40.1
N16860576: C31.1 R35.1 R36.1
N16860597: C33.1 R39.1 R41.1
N16861090: C38.1 R46.1 R47.1
N16861111: C39.1 R48.1 R49.1
N16862095: C64.1 R59.1 U9.4(VIN-)
N16862099: C64.2 R58.1 U9.3(VIN+)
N16864237: C1.1 U1.1(C1+)
N16864239: C5.2 U1.5(C2-)
N16864245: C5.1 U1.4(C2+)
N16864247: C1.2 U1.3(C1-)
N16864249: J2.3 U1.13(RIN1)
N16864255: J2.2 U1.14(TOUT1)
N16864267: C3.2 U1.6(V-)
N16865777: C66.1 C69.1 F1.2 U11.1(VIN) U11.3(EN) U12.1(VIN) U12.3(EN)
N16866521: D14.1(ANODE) R63.1
N16866539: D15.1(ANODE) R64.1
N16868433: C10.2 U6.2(C2P)
N16868440: C10.1 U6.3(C2N)
N16868466: C11.2 U6.5(C1N)
N16868469: C11.1 U6.4(C1P)
N16869084: R17.2 U6.26(IREF)
N16877771: R16.2 U6.20(D2)
N16888094: U13.1(REF) Y1.3(OUT)
N168368250: D1.1(ANODE) R42.1
N168642928: C2.2 U1.2(V+)

Pads without a net: J1 3 11 17 19; J2 1 4 6 7 8 9; J3 7 9 10 11 12; J4 7 9 10 11 12; J5 7 9 10 11 12; J6 7 9 10 11 12; J7 7 9 10 11 12; U1 7 8 9 10; U2 1 2 3 4 7 10 11 12 13 15 17 18 19 20 21 26 27 28 29 30 31 32 33 38 39 51 66 67 68 69 70 71 72 73 76 77 78 79 84 85 86 87 90 91 92 93 94 95 96 97 98 99 100; U5 3; U7 42 43 51 52 53; U11 4; U12 4; U13 2 3 8; Y1 1

## Via types
v1: diameter 0.61, hole 0.305, TOP to BOTTOM, 474 vias
v2: diameter 0.762, hole 0.457, TOP to BOTTOM, 5 vias

## Routing (per net, layer and track width the routed paths; a pad name or vN(x,y) marks a point on that pad's centre or on a via; arc(x,y) is an arc through that point)
GND: length 179.5
  TOP w0.203: 51.1,45.9 51.3,45.7 51.3,44.8 51.55,44.55 U7.38 ; R50.2 v1(58.56,50.5) ; C2.1 v1(67.6,74.1)
  TOP w0.254: U2.60 54.5,66.7 54.1,66.3 ; 48.2,74.5 47.8,74.9 U2.88 ; 38.1,70.2 U2.9 41.1,70.2 41.5,69.8 ; 53.7,61.8 53.3,61.4 U2.49 53.3,58.8 53.1,58.6 ; 54.2,73.4 54.5,73.7 U2.74 57.2,73.7 57.5,73.4 ; 46.3,81.2 46.4,81.1 46.4,80.8 46.8,80.4 47.9,80.4 ; 49.8,61.9 49.3,61.4 U2.41 49.3,59 48.8,58.5 ; 53.1,66.9 53.7,66.3 ; 49.44,80.64 49.2,80.4 47.9,80.4 ; 47.9,80.4 U10.2 ; R52.2 60.76,45.8 59.4,45.8 58.66,46.54 R53.2
  TOP w0.4: 10.1,69.6 10.2,69.7 U6.8 10.2,74.2 ; 15.8,74.2 U6.16 15.8,69.4 ; 9.6,69.6 9.5,69.7 U6.7 9.5,74.2 ; 13.6,74.3 13.7,74.2 U6.13 13.7,69.4 13.8,69.3 ; 20,74.2 U6.22 20,69.4 ; 22,74.2 22.1,74.1 U6.25 22.1,69.4 ; 20.7,69.4 U6.23 20.7,74.2 ; U6.29 24.9,69.5 ; 21.4,69.4 U6.24 21.4,74.2 ; 16.5,74.2 U6.17 16.5,69.4 ; 19.3,74.2 U6.21 19.3,69.3 ; 25.6,69.5 U6.30 26.4,71.8
  TOP w0.508: C68.2 39.6,86.5 38.79,85.69 37.11,85.69 36.44,86.36 R62.1 ; 54.6,61.4 54.1,61.9 54.1,62 ; J1.20 J1.18 J1.16 J1.14 J1.12 J1.10 J1.8 J1.6 J1.4 ; J1.20 91.34,42.76 ; J1.20 90.4,41.9 ; 91.34,42.76 91.34,41.34 91.3,41.3 ; 91.34,42.76 92.3,41.8 ; U12.2 v1(30.5,93.5) ; 41,61.4 41.6,62 41.8,62 ; C60.1 35.06,45.96 34.86,45.96 33.64,44.74 R19.1 ; U11.2 v1(30.6,89.9)
  TOP w0.711: DC1.3 8.96,91.1 ; DC1.3 5.84,91.1 ; DC1.3 7.4,88.54 ; 9.64,94.3 DC1.2 ; DC1.2 12.2,95.86 ; DC1.2 12.2,92.74 ; DC1.2 14.76,94.3 ; 78.74,87.76 J2.5 80.06,89.08
  BOTTOM w0.508: 51.6,44.2 52.08,44.2 52.09,44.19 53.69,44.19 53.7,44.2 ; C51.1 54.26,43.16 52.74,41.64 C44.1 ; 91.3,41.4 91.34,41.44 91.34,42.66 ; 91.34,42.74 90.3,41.7 ; 91.34,42.74 91.34,42.66 ; 91.34,42.74 J1.20 J1.18 J1.16 J1.14 J1.12 J1.10 ; 91.34,42.66 92.2,41.8
  BOTTOM w0.711: DC1.2 14.76,94.3 ; DC1.2 12.2,92.74 ; DC1.2 12.2,95.86 ; DC1.2 9.64,94.3 ; 78.74,87.76 J2.5 ; J2.5 78.74,90.4 ; J2.5 80.06,89.08 ; J2.5 77.42,89.08 ; 5.84,91.1 DC1.3 ; DC1.3 8.96,91.1 ; DC1.3 7.4,88.54
  vias: v1(3.93,61.45) v1(3.93,57.45) v1(4.03,68.45) v1(4.03,64.45) v1(4.33,90.75) v1(4.33,86.75) v1(4.43,79.15) v1(4.43,75.15) v1(4.35,29.77) v1(7.83,26.95) v1(7.83,22.95) v1(8.35,29.77) v1(9.8,80.2) v1(9.8,77.7) v1(9.8,74.5) v1(10.7,67.2) v1(10.7,61.7) v1(10.93,37.35) v1(10.93,33.35) v1(11.13,26.95) v1(11.13,22.95) v1(12.5,63.6) v1(12.5,61.7) v1(12.7,74.5) v1(13.1,78.2) v1(14.2,67.6) v1(14.23,37.15) v1(14.23,33.15) v1(14.3,61.7) v1(14.5,41.39) v1(14.8,82.37) v1(15.8,39.29) v1(16.1,74.9) v1(16.09,47.92) v1(16.09,43.92) v1(16.53,67.55) v1(16.53,63.55) v1(16.55,56.93) v1(16.6,60.3) v1(16.7,25.7) v1(17.7,77.9) v1(18.3,24.2) v1(18.5,41.39) v1(18.8,82.37) v1(19.4,74.7) v1(19.5,96.3) v1(19.56,34.93) v1(19.56,30.93) v1(19.56,26.93) v1(19.8,39.29) v1(20.09,47.92) v1(20.09,43.92) v1(20.53,67.95) v1(20.53,63.95) v1(20.55,56.93) v1(20.8,74.7) v1(20.9,89.4) v1(20.9,87.7) v1(21.2,96.3) v1(22.1,74.7) v1(22.3,41.39) v1(22.5,39.29) v1(22.6,89.4) v1(22.6,87.7) v1(22.8,82.37) v1(22.9,96.4) v1(23,24.1) v1(23.3,74.7) v1(23.56,34.93) v1(23.56,30.93) v1(23.56,26.93) v1(24.09,47.92) v1(24.09,43.92) v1(24.4,89.4) v1(24.4,87.7) v1(24.6,96.4) v1(24.8,37.09) v1(26.3,41.39) v1(26.5,39.29) v1(26.8,96.4) v1(26.8,87.7) v1(26.8,82.37) v1(27,34.49) v1(27,27.1) v1(27.65,66.96) v1(27.65,62.96) v1(27.65,58.96) v1(28.1,48.7) v1(28.1,47.1) v1(28.2,45) v1(28.3,24.3) v1(28.5,96.4) v1(28.5,87.7) v1(28.8,37.09) v1(29.1,50) v1(29.8,45) v1(30.35,41.47) v1(30.6,87.7) v1(30.9,96.4) v1(30.9,49.8) v1(31,39.29) v1(31,34.49) v1(32.5,45) v1(32.6,96.4) v1(32.6,49.7) v1(32.7,25.8) v1(32.83,72.75) v1(32.83,68.75) v1(34,33.39) v1(34.4,49.7) v1(34.35,41.47) v1(34.4,24.2) v1(34.5,28) v1(35,39.29) v1(35.2,96.4) v1(36,80.5) v1(36.5,92.8) v1(36.55,57.63) v1(36.9,96.4) v1(37.4,81.8) v1(37.4,49.6) v1(37.6,30.12) v1(37.6,26.12) v1(37.9,38.3) v1(38,33.39) v1(38.2,92.8) v1(38.7,49.6) v1(39.4,36.6) v1(39.5,94.97) v1(39.5,90.97) v1(39.6,80.1) v1(39.9,49.6) v1(40.3,24.1) v1(40.55,57.63) v1(40.6,59.6) v1(40.8,86.8) v1(41.6,35.6) v1(42,86.8) v1(42.5,39.5) v1(42.93,66.85) v1(42.93,62.85) v1(43.5,94.97) v1(43.5,90.97) v1(43.5,35.6) v1(43.5,33) v1(43.65,57.63) v1(44.3,27.3) v1(44.3,24.1) v1(44.4,80.1) v1(44.75,72.03) v1(44.75,69.33) v1(45.9,34.4) v1(46.9,33) v1(47.5,94.97) v1(47.5,90.97) v1(47.65,57.63) v1(48.6,74.3) v1(48.75,72.03) v1(48.75,69.33) v1(49.2,26.3) v1(49.2,24.3) v1(49.85,81.03) v1(50.2,33.19) v1(50.7,62.9) v1(50.9,28.1) v1(51.45,83.03) v1(51.4,24.2) v1(51.5,94.97) v1(51.5,90.97) v1(52.6,50.7) v1(52.75,72.03) v1(52.75,69.33) v1(53.22,31.21) v1(53.22,27.21) v1(53.85,81.03) v1(53.8,62.9) v1(54.2,33.19) v1(54.7,24.2) v1(54.8,59.6) v1(55.45,83.03) v1(55.5,94.97) v1(55.5,90.97) v1(55.65,78.23) v1(55.6,53.3) v1(55.6,51.8) v1(55.6,40.8) v1(55.8,55) v1(56.2,59.6) v1(57,24.2) v1(57.22,31.21) v1(57.22,27.21) v1(57.6,61.4) v1(57.85,81.03) v1(58,70.2) v1(58.1,42) v1(58.6,25.7) v1(59.45,83.03) v1(59.65,78.23) v1(59.7,33.19) v1(60.5,24.1) v1(60.6,27.6) v1(61.45,73.03) v1(61.7,48.1) v1(61.7,41.99) v1(62,25.5) v1(62.1,58.9) v1(62.6,34.9) v1(62.8,48.1) v1(62.8,46.7) v1(63.65,78.23) v1(63.7,33.19) v1(64.4,52.6) v1(64.4,36.79) v1(65.1,50.8) v1(65.2,46.7) v1(65.45,73.03) v1(65.49,94.03) v1(65.7,41.99) v1(65.7,25.7) v1(66.7,33.3) v1(67.4,57.6) v1(67.4,24.2) v1(67.7,60.9) v1(67.7,53.7) v1(68.4,36.79) v1(69.45,73.03) v1(69.49,94.03) v1(69.65,31.21) v1(69.65,27.21) v1(69.7,41.99) v1(70.8,24.3) v1(71.2,36.69) v1(71.5,61) v1(71.7,57.5) v1(71.8,54.8) v1(72.8,86.2) v1(72.8,44.29) v1(72.9,80.6) v1(72.9,73) v1(73.49,94.03) v1(73.65,31.21) v1(73.65,27.21) v1(73.7,41.99) v1(75.14,58.46) v1(75.14,54.46) v1(75.2,36.69) v1(75.7,76.9) v1(75.9,86.2) v1(76.7,35.1) v1(76.8,44.29) v1(76.9,27) v1(76.9,24.2) v1(77.2,80.6) v1(77.3,33.1) v1(77.49,94.03) v1(77.5,38.3) v1(78.2,42.19) v1(78.8,86.2) v1(79.14,58.46) v1(79.14,54.46) v1(80.1,35.6) v1(80.3,33.1) v1(80.8,44.29) v1(81.1,39.4) v1(81.49,94.03) v1(82.2,42.19) v1(82.7,25.8) v1(83.1,79.7) v1(83.1,78) v1(83.2,37.1) v1(83.2,35.2) v1(83.3,33.1) v1(84,66.4) v1(84,28.1) v1(84.4,24) v1(84.8,56.4) v1(84.8,53.8) v1(84.8,44.29) v1(85.4,85.5) v1(86.1,22.3) v1(86.5,63.7) v1(86.6,76.1) v1(87.2,24.6) v1(87.5,68.9) v1(88.6,22.3) v1(88.8,82.1) v1(88.98,34.04) v1(88.98,30.04) v1(88.98,26.04) v1(89.7,88.1) v1(90.1,82.1) v1(91.3,80.3) v1(91.4,82.1) v1(91.4,69.2) v1(91.4,68) v1(91.9,88.1) v1(91.9,86) v2(46.5,47) v2(46.5,44.6) v2(47.7,45.8) v2(48.9,47) v2(48.9,44.6)
GND_EARTH: length 279.9
  TOP w0.508: 89.3,5.8 89.3,5.4 88.8,4.9
  TOP w0.711: 88.77,3.3 MH2.1 92.5,7.03 ; 92.5,92.97 MH3.1 88.77,96.7 ; 3.3,92.97 MH4.1 7.03,96.7 ; 3.3,7.03 MH1.1 7.03,3.3
  TOP w2: 85.7,98.2 J2.10 93.8,90.5 ; J2.11 60.7,98.2
  BOTTOM w0.508: 89.3,5.5 89.3,5.4 88.7,4.8
  BOTTOM w0.711: 88.65,14.05 90.55,14.05 ; 7.03,3.3 MH1.1 3.3,7.03 ; 88.77,96.7 MH3.1 92.5,92.97 ; 7.03,96.7 MH4.1 3.3,92.97 ; 88.77,3.3 MH2.1 92.5,7.03
  BOTTOM w0.762: 5.1,14.1 5.15,14.05 7.05,14.05 ; 89.9,15.4 88.64,14.14 88.64,14.05 88.65,14.05 90.1,12.6 ; 72.7,4.7 72.7,13.49 72.14,14.05 ; 23.2,4.9 23.2,13.6 23.66,14.05 ; 7.05,14.05 J3.13 7.16,13.96 5.8,12.6 ; 7.05,14.05 5.7,15.4 ; J5.13 56.2,13.6 56.2,4.9 ; 39.7,4.9 39.7,13.6 J6.13
  BOTTOM w1.27: J6.14 J6.13 ; J4.14 23.66,14.05 ; J3.14 J3.13 ; 72.14,14.05 J5.13 ; 88.64,14.05 J7.13
  BOTTOM w2: J2.11 60.7,97.9 60.8,98 ; J6.14 J5.13 55.8,14.9 55.8,19 54.91,19.89 J6.8 ; J7.8 89.79,19.89 89.8,19.9 ; 85.8,98 85.7,97.9 J2.10 93.6,90.5 93.7,90.4 ; J3.8 22.01,19.89 23,18.9 23,14.71 23.66,14.05 J3.14 ; J7.13 72.14,14.05 72.62,14.53 72.62,18.48 71.21,19.89 J5.8 ; J4.14 J6.13 39.1,15.11 39.1,18.6 37.81,19.89 J4.8
  vias: v1(1.16,87.8) v1(1.16,82.72) v1(1.16,77.64) v1(1.16,72.56) v1(1.16,67.48) v1(1.16,62.4) v1(1.16,57.32) v1(1.16,52.24) v1(1.16,47.16) v1(1.16,42.08) v1(1.16,37) v1(1.16,31.92) v1(1.2,27.5) v1(1.16,21.76) v1(1.16,16.68) v1(12.08,99.04) v1(12.08,3.74) v1(12.08,1.34) v1(17.16,99.04) v1(17.16,3.74) v1(17.16,1.34) v1(22.24,99.04) v1(22.24,3.74) v1(22.24,1.34) v1(27.32,99.04) v1(27.32,3.74) v1(27.32,1.34) v1(32.4,99.04) v1(32.4,3.74) v1(32.4,1.34) v1(37.48,99.04) v1(37.48,3.74) v1(37.48,1.34) v1(42.56,99.04) v1(42.56,3.74) v1(42.56,1.34) v1(47.64,99.04) v1(47.64,3.74) v1(47.64,1.34) v1(52.72,99.04) v1(52.72,3.74) v1(52.72,1.34) v1(57.8,99.04) v1(57.8,3.74) v1(57.8,1.34) v1(62.88,99.04) v1(62.88,3.74) v1(62.88,1.34) v1(67.96,99.04) v1(67.96,3.74) v1(67.96,1.34) v1(73.04,99.04) v1(73.04,3.74) v1(73.04,1.34) v1(78.12,99.04) v1(78.12,3.74) v1(78.12,1.34) v1(83.2,99.04) v1(83.2,3.74) v1(83.2,1.34) v1(94.46,85.9) v1(94.46,80.82) v1(94.46,75.74) v1(94.46,70.66) v1(94.46,65.58) v1(94.46,60.5) v1(94.46,55.42) v1(94.46,50.34) v1(94.46,45.26) v1(94.46,40.18) v1(94.46,35.1) v1(94.46,30.02) v1(94.46,24.94) v1(94.46,19.86) v1(94.46,14.78)
VCC_3.3V: length 427.6
  TOP w0.254: R72.1 v1(34.7,77.3) ; U2.48 v1(52.8,62.1) ; U10.5 v1(47.9,83.8) ; U2.61 v1(53.9,67.2) ; U2.89 v1(47.3,74.3) ; U2.40 v1(48.8,62.1) ; U2.75 v1(58,74.2) ; U2.8 v1(41.7,70.7)
  TOP w0.4: C18.1 24.2,60.34 U6.28 24.2,74.1 24.7,74.6 32.66,74.6 R73.1 ; 8.8,82.14 R64.2 10.9,82.36 U6.9 10.9,69 9.7,67.8 8.8,68.7 U6.6 8.8,82.14
  TOP w0.508: C4.2 58.86,84.16 54.48,79.78 46.52,79.78 45.4,80.9 C63.1 43.94,83.04 U9.5 ; C4.2 63.54,84.3 66.36,84.3 ; C4.2 63.4,87.99 65.91,90.5 77.3,90.5 ; U4.8 79.09,83.96 C7.2 77.3,84.06 77.3,90.5 ; 82.64,65.3 82.64,66.68 R71.1 ; 82.64,65.3 88.4,65.3 J1.1 ; 82.64,65.3 R65.1 R66.1 82.74,58 R67.1 ; C18.1 25.8,58.74 25.8,56.5 24.94,55.64 R12.2 R11.2 R10.2 10.66,55.64 9.7,56.6 9.7,67.8 ; R6.1 v1(81.24,71.94) 84.4,75.1 84.4,76.5 85.46,77.56 C8.2 ; 77.3,90.5 80,90.5 84,86.5 85.9,86.5 87.6,84.8 U5.8 87.6,83.5 86.74,82.64 C9.1 84.5,81.64 84.5,80.3 85.46,79.34 R70.1 C8.2 ; C8.2 86.74,77.56 87.6,76.7 U3.8 ; v1(83.2,71.9) 84.04,72.74 R68.2 ; C72.2 59.74,57.66 v1(59.76,57.64) U13.6 ; L1.1 34.7,67.24 v1(34.7,75.6) R73.1 ; v1(65.31,57.69) 65.31,55.76 66.44,54.63 C71.2 ; R4.1 v1(66.54,62.94)
  BOTTOM w0.508: C15.2 56.76,74.24 55.36,75.64 C14.2 ; C15.2 v1(58,74.2) 59.4,75.6 77.58,75.6 v1(81.24,71.94) 83.16,71.94 v1(83.2,71.9) 87.5,71.9 88.8,70.6 J1.1 J1.2 ; C15.2 56.76,68.76 55.24,67.24 C16.2 v1(53.9,67.2) ; v1(47.9,83.8) 34.7,83.8 ; 34.7,83.8 v1(34.7,77.3) ; 34.7,83.8 v1(34.7,92.69) ; C12.2 v1(48.8,62.1) ; C12.2 37.04,60.76 34.7,63.1 v1(34.7,75.6) 40.4,75.6 ; C12.2 C13.2 ; 40.4,75.6 40.36,75.56 C17.2 v1(41.7,70.7) ; 40.4,75.6 47.26,75.6 C14.2 ; C14.2 v1(47.3,74.3) ; C13.2 v1(52.8,62.1) ; C13.2 56.64,60.76 v1(59.76,57.64) 59.81,57.69 v1(65.31,57.69) 66.54,58.92 v1(66.54,62.94)
  BOTTOM w0.762: v1(34.7,92.69) v1(34.7,77.3) v1(34.7,75.6)
  vias: v1(33.96,93.4) v1(33.96,92.7) v1(34.7,93.43)
VCC_3.3V_OUT: length 28.8
  TOP w0.254: R58.2 33.8,84.7 33.3,85.2 R60.2 21.4,86.7 20,85.3 R63.2
VCC_3.3V_SWITCH: length 106.4
  TOP w0.203: v1(45.5,49.3) 45.4,49.3 44.95,49.75 U7.62 ; U7.33 v1(55.55,42.05) ; U7.48 53.15,49.55 v1(54.2,50.6)
  TOP w0.254: R59.2 33.8,83.1 33.3,82.6 R60.1
  TOP w0.508: R57.1 v1(66.44,48.3) ; R42.2 v1(62.8,44.9) ; R45.2 v1(60,54.1)
  BOTTOM w0.508: C43.2 54.2,49.56 v1(54.2,50.6) ; v1(45.5,49.3) C42.2 45.46,50.94 44.59,51.82 44.59,51.85 43.54,52.9 ; 43.54,52.9 43.54,52.94 44.4,53.8 51,53.8 v1(54.2,50.6) ; 43.54,52.9 C45.2 30.8,57.94 v1(30.8,80.7) v1(30.8,81.5) ; v1(54.2,50.6) 56.5,50.6 v1(60,54.1) 64.9,54.1 66.44,52.56 v1(66.44,48.3) 66.44,45.84 65.5,44.9 v1(62.8,44.9) 58.4,44.9 v1(55.55,42.05) 54.71,42.05 C44.2
VCC_5V: length 8.2
  TOP w0.711: 9.64,88.3 DC1.1 ; DC1.1 12.2,86.74 ; DC1.1 14.76,88.3 ; DC1.1 12.2,89.86
VDDA3V3: length 10.2
  TOP w0.254: C20.1 33.02,63.66 L2.1 35.06,65.7 L1.2 36.5,65.7 38.5,63.7 U2.22
VSSA: length 10.3
  TOP w0.254: U2.25 38.9,62.2 36.7,60 L3.2 33.34,61.9 L4.1 32.92,62.14 C20.2
BS0: length 15
  TOP w0.254: R10.1 R13.2 11.6,59.64 U6.10
BS1: length 15.5
  TOP w0.254: R11.1 R14.2 13.4,59.64 13.4,64.1 12.3,65.2 U6.11
BS2: length 15.9
  TOP w0.254: R12.1 R15.2 15.2,59.64 15.2,63 13,65.2 U6.12
C0_LED: length 61.5
  TOP w0.203: v1(7.1,38) D12.1 ; U7.61 45.45,50.95 44.02,52.38 9.92,52.38 v1(7.1,55.2) D8.1 ; v1(7.1,46.5) D10.1
  BOTTOM w0.203: v1(7.1,38) v1(7.1,46.5) v1(7.1,55.2)
C1_LED: length 62.5
  TOP w0.203: U7.63 44.45,51.15 43.63,51.97 9.67,51.97 v1(8.5,50.8) D9.1 ; v1(8.5,33.7) D13.1 ; v1(8.5,42.3) D11.1
  BOTTOM w0.203: v1(8.5,33.7) v1(8.5,42.3) v1(8.5,50.8)
C2_LED: length 67.2
  TOP w0.203: v1(7.8,36) D6.1 ; U7.64 43.95,50.95 43.33,51.57 10.97,51.57 9.2,49.8 5.2,49.8 4.9,50.1 4.9,52.18 D2.1 v1(7.8,53.2) ; v1(7.8,44.5) D4.1
  BOTTOM w0.203: v1(7.8,53.2) v1(7.8,44.5) v1(7.8,36)
C3_LED: length 63.6
  TOP w0.203: D3.1 v1(9.4,48.8) 11.76,51.16 42.64,51.16 43.2,50.6 U7.1 ; v1(9.4,40.3) D5.1 ; v1(9.4,31.7) D7.1
  BOTTOM w0.203: v1(9.4,48.8) v1(9.4,40.3) v1(9.4,31.7)
CLK_50M: length 6.6
  TOP w0.203: R74.2 R31.2 54.56,54.2 56.1,54.2 57.4,55.5 U13.5
CLK_50M_MK60: length 12.7
  TOP w0.203: U13.7 61.03,57.87 60.2,58.7 55.2,58.7 54.2,57.7 R74.1 53.8,58.06 U2.50
D/C#: length 43.9
  TOP w0.203: U6.15 15.1,76.53 17.37,78.79 50.41,78.79 51.3,77.9 U2.81
E6071_AVDD_1.8V: length 30.9
  TOP w0.203: U7.9 v1(44.25,45.55) ; U7.20 v1(45.45,42.35) ; U7.14 v1(44.25,43.05) ; U7.30 v1(50.45,42.35) ; U7.5 v1(44.25,47.55) ; U7.25 v1(47.95,42.35)
  BOTTOM w0.508: v1(44.25,43.05) 42.71,43.05 C58.2 ; v1(44.25,43.05) 44.75,43.05 v1(45.45,42.35) 45.45,40.91 C55.2 C53.2 ; v1(44.25,43.05) 44.2,43.1 C58.2 ; C54.2 50.45,40.91 v1(50.45,42.35) ; C54.2 50.74,40.86 52.2,39.4 L5.2 ; C54.2 C53.2 ; C58.2 C57.2 ; v1(44.25,45.55) 42.71,45.55 C57.2 ; C53.2 47.95,40.91 v1(47.95,42.35) ; v1(44.25,47.55) 42.71,47.55 C56.2 C57.2
E6071_CT_1.8V: length 85.3
  TOP w0.203: U7.34 51.35,42.55 51.04,42.86 51.04,43.14 51.05,43.15 ; 51.05,43.15 51.15,43.05 U7.35 ; 51.05,43.15 v1(51,43.2)
  TOP w0.762: 30.8,21.4 30.76,21.36 J4.4 32.03,18.62 J4.5 ; J5.5 65.03,18.62 J5.4 63.76,21.36 63.8,21.4
  BOTTOM w0.508: v1(82.7,22.8) 84.9,22.8 86,23.9 86,38.7 83.8,40.9 58.2,40.9 56.96,39.66 C52.2 L5.1 53.44,40.6 52.01,40.6 51.31,41.29 51.31,42.89 v1(51,43.2) C51.2
  BOTTOM w0.762: J3.5 15.53,18.62 J3.4 14.26,21.36 14.3,21.4 ; J6.5 48.53,18.62 J6.4 47.26,21.36 47.3,21.4 ; J7.5 81.53,18.62 J7.4 80.26,21.36 80.3,21.4
  vias: v1(16,22.8) v1(16.7,22.8) v1(30.4,21.6) v1(31.1,21.6) v1(49,22.8) v1(49.7,22.8) v1(63.4,21.6) v1(64.1,21.6) v1(82,22.8)
E6071_VDD_CORE_1.2V: length 47.2
  TOP w0.203: U7.2 v1(44.25,49.05) ; U7.36 51.55,43.55 50.6,44.5 v1(50.6,45.1) ; v1(42.8,40.9) 43.7,40.9 43.95,41.15 U7.17 ; U7.57 v1(47.45,49.25)
  BOTTOM w0.508: v1(47.45,49.25) 47.45,50.89 C49.2 ; v1(47.45,49.25) 46.74,48.54 44.76,48.54 v1(44.25,49.05) 42.71,49.05 C48.2 42.66,49.14 40.9,50.9 C50.2 35.84,42.06 37,40.9 v1(42.8,40.9) 43.86,40.9 C47.2 ; v1(47.45,49.25) 50.09,49.25 50.6,48.74 v1(50.6,45.1) C46.2
I2C0_PROT: length 37.9
  TOP w0.203: U3.7 88.87,75.87 87.26,74.26 R68.1 84.46,74.26 79.6,69.4 64.21,69.4 60.01,65.2 U2.57
I2C0_SCLK: length 56.1
  TOP w0.203: U2.55 60.43,64.2 64.63,68.4 82.84,68.4 R71.2 86.06,71.06 87.3,72.3 91.4,72.3 92.2,73.1 92.2,80.7 91.9,81 89.3,81 88.87,80.57 U5.2 88.87,78.36 90.14,77.09 U3.6
I2C0_SDATA: length 53.1
  TOP w0.203: 89.5,72.8 90.8,72.8 91.41,73.41 U3.5 ; 89.5,72.8 89.5,77.15 89.15,77.5 88.3,77.5 87.6,78.2 U5.1 87.6,80.1 86.84,80.86 R70.2 ; 89.5,72.8 87,72.8 86.1,71.9 84.5,71.9 81.5,68.9 64.42,68.9 60.22,64.7 U2.56
I2C1_SCL: length 40.7
  TOP w0.203: U6.18 17.2,76.2 18.3,77.3 R72.2 33.23,78.39 50.16,78.39 50.8,77.75 U2.82
I2C1_SDA: length 51.8
  TOP w0.203: U6.19 17.9,74.9 18.6,75.6 R73.2 32.94,76.4 34.8,76.4 36.38,77.98 49.99,77.98 50.3,77.67 U2.83
  TOP w0.254: R16.1 17.9,59.64 U6.19
INTN: length 4.9
  TOP w0.203: D1.2 55.43,46.05 U7.41
JTAG_TCLK: length 61.6
  TOP w0.203: v1(52.7,66.1) 48.2,66.1 45.8,63.7 U2.34
  BOTTOM w0.203: J1.9 90.16,56.9 92,56.9 92.5,57.4 92.5,61.3 91.9,61.9 86.7,61.9 82.5,66.1 v1(52.7,66.1)
JTAG_TDI: length 53.2
  TOP w0.203: U2.35 46.3,63.49 48.17,65.36 v1(52.7,65.36) ; R65.2 84.18,60.62 J1.5
  BOTTOM w0.203: v1(52.7,65.36) 82.67,65.36 87.41,60.62 J1.5
JTAG_TDO: length 64.4
  TOP w0.203: v1(52.7,64.63) 48.14,64.63 46.8,63.29 U2.36 ; J1.13 84.32,50.46 R67.2
  BOTTOM w0.203: J1.13 87.3,51.96 87.3,56.2 87.9,56.8 89.1,56.8 89.92,57.62 89.92,58.68 89.2,59.4 88.05,59.4 82.83,64.63 v1(52.7,64.63)
JTAG_TMS: length 51.8
  TOP w0.203: v1(52.7,63.89) 48.11,63.89 47.3,63.08 U2.37 ; J1.7 84.18,58.08 R66.2
  BOTTOM w0.203: J1.7 82.99,63.89 v1(52.7,63.89)
MDC: length 20.9
  TOP w0.203: R44.1 64.21,50.33 64.21,44.23 63.27,43.29 55.73,43.29 53.98,45.05 U7.39
MDIO: length 22.2
  TOP w0.203: R45.1 R43.1 63.8,49.24 63.8,44.4 63.1,43.7 55.9,43.7 54.05,45.55 U7.40
P5_ID0: length 3.3
  TOP w0.203: R28.1 48.45,51.79 U7.55
P5_ID1: length 4.1
  TOP w0.203: U7.54 48.95,51.55 49.5,52.1 50.26,52.1 R29.1
P5_INDV: length 2.8
  TOP w0.203: R27.1 47.95,52.79 U7.56
P5_MODE0: length 7.1
  TOP w0.203: R33.1 57,49.54 R50.1 56.59,49.05 U7.47
P5_MODE1: length 11
  TOP w0.203: R37.1 59.4,50.64 59.4,50.24 R51.1 59.19,48.55 U7.46
P5_MODE2: length 8.5
  TOP w0.203: U7.45 58.79,48.05 R52.1
P5_MODE3: length 5.3
  TOP w0.203: R53.1 56.29,47.55 U7.44
P5_OUTCLK: length 4.4
  TOP w0.203: U7.49 51.45,51.15 52.4,52.1 53.26,52.1 R31.1
P5_OUTDV: length 3.5
  TOP w0.203: U7.50 50.95,51.29 R30.1
R0_LED: length 16.5
  TOP w0.203: R56.1 36.56,56 42.6,56 46.95,51.65 U7.58
R1_LED: length 15.2
  TOP w0.203: U7.59 46.45,51.45 42.4,55.5 35.46,55.5 R55.1
R2_LED: length 14.1
  TOP w0.203: U7.60 45.95,51.38 42.33,55 R54.1
RES#: length 45.5
  TOP w0.203: U2.80 51.8,78 50.6,79.2 17.2,79.2 16.96,78.96 14.4,76.4 U6.14
RESETN: length 27
  TOP w0.203: U7.37 54.4,44.05 55.56,42.89 66.59,42.89 67.96,44.26 R57.2 C62.1 70.37,50.9 KEY2.1
RMII0_CRS_DV: length 9.8
  TOP w0.203: R30.2 53,54.86 v1(53,56.1) ; v1(49.5,56.1) 50.8,57.4 U2.44
  BOTTOM w0.203: v1(53,56.1) v1(49.5,56.1)
RMII0_MDC: length 44
  TOP w0.203: U2.54 60.7,63.7 64.9,67.9 72.9,67.9 74.3,66.5 74.3,59.7 73.3,58.7 64.7,58.7 63.7,57.7 63.7,53.8 63,53.1 R44.2
RMII0_MDIO: length 43.8
  TOP w0.203: R43.2 61.5,53.1 63.29,54.89 63.29,57.87 64.53,59.11 73.13,59.11 73.89,59.87 73.89,66.33 72.73,67.49 65.07,67.49 60.77,63.2 U2.53
RMII0_RXD0: length 14.3
  TOP w0.203: U2.43 50.3,58.26 50.31,58.25 50.31,57.81 v1(49.5,57) ; R33.2 v1(57,54.1)
  BOTTOM w0.203: v1(57,54.1) 57,55.8 55.8,57 v1(49.5,57)
RMII0_RXD1: length 15.6
  TOP w0.203: R37.2 v1(58.5,54.1) ; v1(49.5,57.9) 49.8,58.2 U2.42
  BOTTOM w0.203: v1(49.5,57.9) 57.3,57.9 58.5,56.7 v1(58.5,54.1)
RMII0_TXD0: length 6.9
  TOP w0.203: R28.2 50.54,55.4 51.2,55.4 51.8,56 U2.46
RMII0_TXD1: length 6.1
  TOP w0.203: U2.47 52.3,55.66 R29.2
RMII0_TXEN: length 7.4
  TOP w0.203: R27.2 49.04,55.4 49.9,55.4 51.3,56.8 U2.45
RXN0: length 56.7
  TOP w0.203: U7.8 42.47,46.05 42.43,46.1 38.67,46.1 36.81,44.23 36.81,41.53 35.37,40.09 15.37,40.09 12.71,37.43 12.71,34.13 12.7,34.13 12.7,32.46 R25.2 13.47,31.66 12.71,30.9 12.71,22.07 13.56,21.21 15.48,21.21 J3.6
RXN1: length 45.7
  TOP w0.203: J4.6 33.3,16 33.5,15.8 36.2,15.8 37.2,16.8 37.2,22.83 32.3,27.73 32.3,30.9 31.54,31.66 R26.2 31.5,32.29 31.7,32.49 32.09,32.49 32.3,32.69 32.3,33.1 32.3,33.1 32.3,34 33.01,34.71 38.61,34.71 41.1,37.2 41.1,42.06 41.54,42.5 42.43,42.5 42.47,42.55 U7.15
RXN2: length 25.3
  TOP w0.203: J6.6 48.48,21.21 46.56,21.21 45.71,22.07 45.71,30.9 46.47,31.66 R40.2 46.5,31.71 45.71,32.5 45.71,32.97 44.9,33.77 44.9,40.53 44.95,40.57 U7.19
RXN3: length 49.8
  TOP w0.203: J5.6 66.3,16 66.5,15.8 69.2,15.8 70.2,16.8 70.2,22.83 65.3,27.73 65.3,30.9 64.54,31.66 R41.2 64.5,31.7 65.3,32.5 65.3,32.93 65.29,32.93 65.29,33.93 63.33,35.9 50.8,35.9 48.5,38.2 48.5,40.53 48.45,40.57 U7.26
RXN4: length 51.5
  TOP w0.203: 78.7,33.17 78.7,35.2 75.8,38.1 51.1,38.1 49.9,39.3 49.9,40.53 49.95,40.57 U7.29 ; 78.7,33.17 78.7,33 ; 78.7,33.17 78.7,33.17 78.7,32.46 R49.2 79.47,31.66 78.71,30.9 78.71,22.07 79.56,21.21 81.48,21.21 J7.6
RXP0: length 57.4
  TOP w0.203: U7.7 42.47,46.55 42.43,46.5 38.5,46.5 36.4,44.4 36.4,41.7 35.2,40.5 15.2,40.5 12.3,37.6 12.3,34.3 12.3,34.3 12.3,32.46 R23.2 11.54,31.66 12.3,30.9 12.3,21.9 12.99,21.21 J3.3
RXP1: length 46.4
  TOP w0.203: J4.3 30.84,16 32.73,16 33.33,15.39 36.37,15.39 37.61,16.63 37.61,22.99 32.71,27.89 32.71,30.9 33.47,31.66 R24.2 33.5,32.29 33.3,32.49 32.91,32.49 32.7,32.69 32.71,32.7 32.71,33.83 33.17,34.3 38.77,34.3 41.51,37.03 41.51,41.89 41.71,42.1 42.43,42.1 42.47,42.05 U7.16
RXP2: length 25.3
  TOP w0.203: U7.18 44.45,40.57 44.5,40.53 44.5,33.6 45.3,32.8 45.3,32.5 44.5,31.7 R38.2 44.54,31.66 45.3,30.9 45.3,21.9 45.99,21.21 J6.3
RXP3: length 51.4
  TOP w0.203: U7.27 48.95,40.57 48.9,40.53 48.9,38.37 50.97,36.31 63.49,36.31 65.7,34.1 65.7,33.35 ; 65.7,33.35 65.7,33.1 ; 65.7,33.35 65.7,33.35 65.7,32.46 R39.2 66.47,31.66 65.71,30.9 65.71,27.89 70.61,22.99 70.61,16.63 69.37,15.39 66.33,15.39 65.73,16 63.84,16 J5.3
RXP4: length 51.3
  TOP w0.203: J7.3 78.99,21.21 78.3,21.9 78.3,30.9 77.54,31.66 R48.2 77.5,31.7 78.3,32.5 78.3,32.83 78.29,32.83 78.29,35.03 75.63,37.69 50.93,37.69 49.5,39.13 49.5,40.53 49.45,40.57 U7.28
SYS_RESET#: length 51.4
  TOP w0.203: R4.2 70.67,64.1 KEY1.1 ; R4.2 66.56,65.6 C6.1 63.64,62.7 U2.52 ; R4.2 68,64.04 v1(68,62.9)
  BOTTOM w0.203: v1(68,62.9) 83.41,62.9 86.6,59.71 86.6,50.1 88.78,47.92 J1.15
TXN0: length 75.6
  TOP w0.203: J3.2 11.27,18.98 10.99,18.89 10.74,19.02 10.46,19.3 9.4,19.3 8.3,18.2 8.3,16.5 10,14.8 19.2,14.8 21.5,17.1 21.5,23 16.21,28.29 16.21,30.8 17,31.59 R21.2 16.2,32.46 16.2,33.03 16.21,33.03 16.21,36.23 18.07,38.09 36.37,38.09 38.41,40.13 38.41,43.53 39.47,44.6 42.43,44.6 42.47,44.55 U7.11
TXN1: length 50.9
  TOP w0.203: U7.12 42.47,44.05 42.43,44 40.53,44 39.59,43.07 39.59,38.49 37.71,36.61 29.91,36.61 28.79,35.49 28.79,32.93 28.8,32.93 28.8,32.69 28.59,32.49 28.2,32.49 28,32.29 R22.2 28.04,31.66 28.8,30.9 28.8,27.3 24.7,23.2 24.7,16.43 26.03,15.09 27.69,15.09 28.22,15.62 J4.2
TXN2: length 49.4
  TOP w0.203: U7.22 46.45,40.57 46.4,40.53 46.4,35.77 49.21,32.97 49.21,32.46 R34.2 50,31.59 49.21,30.8 49.21,28.29 54.5,23 54.5,17.1 52.2,14.8 43,14.8 41.3,16.5 41.3,18.2 42.4,19.3 43.46,19.3 43.74,19.02 43.99,18.89 44.27,18.98 J6.2
TXN3: length 48.6
  TOP w0.203: J5.2 61.22,15.62 60.69,15.09 59.03,15.09 57.7,16.43 57.7,23.2 61.8,27.3 61.8,30.9 61.04,31.66 R36.2 61.8,32.46 61.8,33.23 61.79,33.23 61.79,33.73 61.43,34.1 50.1,34.1 47,37.2 47,40.53 46.95,40.57 U7.23
TXN4: length 77.1
  TOP w0.203: U7.32 51.45,40.57 51.4,40.53 51.4,40.1 51.61,39.9 78.97,39.9 82.21,36.67 82.21,32.83 82.2,32.83 82.2,32.4 82.94,31.66 R47.2 83,31.59 82.21,30.8 82.21,28.29 87.5,23 87.5,17.1 85.2,14.8 76,14.8 74.3,16.5 74.3,18.2 75.4,19.3 76.46,19.3 76.74,19.02 76.99,18.89 77.27,18.98 J7.2
TXP0: length 74.1
  TOP w0.203: J3.1 10.9,18.26 10.81,18.53 10.5,18.69 10.29,18.89 9.57,18.89 8.71,18.03 8.71,16.67 10.17,15.21 19.03,15.21 21.09,17.27 21.09,22.83 15.8,28.13 15.8,30.8 15,31.6 R20.2 15.8,32.46 15.8,33.2 15.8,33.2 15.8,36.4 17.9,38.5 36.2,38.5 38,40.3 38,43.7 39.3,45 42.43,45 42.47,45.05 U7.10
TXP1: length 46.8
  TOP w0.203: U7.13 42.47,43.55 42.43,43.6 40.7,43.6 40,42.9 40,38.33 37.87,36.2 30.07,36.2 29.2,35.33 29.2,33.27 ; 29.2,33.27 29.2,33.1 ; 29.2,33.27 29.2,33.27 29.2,32.69 29.41,32.49 29.8,32.49 30,32.29 R18.2 29.97,31.66 29.21,30.9 29.21,27.13 25.11,23.03 25.11,16.59 26.2,15.5 27.53,15.5 27.81,15.79 27.81,16.49 J4.1
TXP2: length 47.2
  TOP w0.203: U7.21 45.95,40.57 46,40.53 46,35.6 48.8,32.8 48.8,32.46 R32.2 48,31.6 48.8,30.8 48.8,28.13 54.09,22.83 54.09,17.27 52.03,15.21 43.17,15.21 41.71,16.67 41.71,18.03 42.57,18.89 43.29,18.89 43.5,18.69 43.81,18.53 43.9,18.26 J6.1
TXP3: length 45.1
  TOP w0.203: J5.1 60.81,16.49 60.81,15.79 60.53,15.5 59.2,15.5 58.11,16.59 58.11,23.03 62.21,27.13 62.21,30.9 62.97,31.66 R35.2 62.2,32.46 62.2,33.4 62.2,33.4 62.2,33.9 61.59,34.51 50.27,34.51 47.4,37.37 47.4,40.53 47.45,40.57 U7.24
TXP4: length 74.8
  TOP w0.203: U7.31 50.95,40.57 51,40.53 51,39.93 51.44,39.49 78.81,39.49 81.8,36.5 81.8,33 81.8,33 81.8,32.46 R46.2 81,31.6 81.8,30.8 81.8,28.13 87.09,22.83 87.09,17.27 85.03,15.21 76.17,15.21 74.71,16.67 74.71,18.03 75.57,18.89 76.29,18.89 76.5,18.69 76.81,18.53 76.9,18.26 J7.1
UART3_RX: length 45.5
  TOP w0.203: U1.12 71.44,82.59 70.35,81.5 60.8,81.5 52.89,73.59 42.61,73.59 40.8,75.4 38,75.4 37.5,74.9 37.5,72.2 38,71.7 U2.6
UART3_TX: length 45.5
  TOP w0.203: U1.11 72.7,82.59 71.21,81.09 60.97,81.09 53.51,73.63 53.06,73.18 42.44,73.18 41.99,73.63 40.63,74.99 38.17,74.99 37.91,74.73 37.91,72.5 38.21,72.2 U2.5
VCOMH: length 12.2
  TOP w0.4: C19.1 23.5,60.84 U6.27
VREFH: length 4.8
  TOP w0.254: L2.2 35.48,63.56 C21.1 37.46,63.2 U2.23
VREFL: length 4.9
  TOP w0.254: L4.2 35.38,62.04 C21.2 37.76,62.7 U2.24
W25B_CLK: length 49
  TOP w0.203: U2.59 59.6,66.2 63.8,70.4 74,70.4 78.57,74.97 78.57,77.27 78.9,77.6 79.5,77.6 79.84,77.26 79.84,74.8 80.24,74.4 80.72,74.4 81.11,74.8 81.11,79.82 83.69,82.4 83.69,85.01 83.4,85.3 82,85.3 81.73,85.03 U4.6
W25B_CS#: length 29
  TOP w0.203: U2.58 59.81,65.7 64.01,69.9 75.54,69.9 R6.2 79.19,73.56 U4.1
W25B_DI: length 35.6
  TOP w0.203: U4.5 83,83.18 77.76,77.93 77.76,75.31 73.66,71.21 63.46,71.21 60.45,68.2 U2.63
W25B_DO: length 32.6
  TOP w0.203: U4.2 80.47,77.83 80.1,78.2 78.6,78.2 78.17,77.77 78.17,75.14 73.83,70.81 63.63,70.81 60.53,67.7 U2.62
W25B_HOLD#: length 34
  TOP w0.203: U4.7 80.47,81.21 77.35,78.1 77.35,75.48 73.49,71.62 63.29,71.62 60.38,68.7 U2.64
W25B_WP#: length 49.6
  TOP w0.203: U2.65 60.3,69.2 63.13,72.03 73.33,72.03 76.95,75.65 76.95,78.27 79.82,81.14 79.82,85.22 80.4,85.8 83.5,85.8 84.1,85.2 84.1,82.1 81.73,79.73 U4.3
WORK_CURRENT: length 35
  TOP w0.203: U2.14 37.7,67.7 37,68.4 v1(37,76.51)
  TOP w0.254: 43.35,85.25 43.35,86.95 TP1.1 ; 43.35,85.25 U9.1 ; 43.35,85.25 43.6,85.5 46.66,85.5 47.27,84.9 U10.6 U10.1 v1(47.27,81.1)
  BOTTOM w0.203: v1(47.27,81.1) 38.7,81.1 37,79.4 v1(37,76.51)
WORK_VOLTAGE: length 47.4
  TOP w0.203: U2.16 38.13,66.7 36.1,68.73 v1(36.1,76.5)
  TOP w0.254: v1(48.53,81.1) U10.3 U10.4 48.53,86.94 TP2.1 47.44,88.16 C68.1 39.56,88.2 R61.1 R62.2
  BOTTOM w0.203: v1(36.1,76.5) 36.1,79.07 38.83,81.8 47.84,81.8 v1(48.53,81.1)
XTAL_IN: length 15.4
  TOP w0.203: U7.3 36.85,48.55 35.94,47.64 34.3,47.64 C61.2 32.54,47.4 30.4,47.4 29.5,48.3 U8.3
XTAL_OUT: length 12.8
  TOP w0.203: U7.4 37.02,48.05 36.17,47.2 34.34,47.2 C60.2 33.44,46.3 U8.1
N11720869: length 7
  TOP w0.203: U3.3 90.14,68.94 89.16,67.96 R69.2
N16836550: length 9.1
  TOP w0.203: U7.6 37.71,47.05 R19.2
N16838678: length 50.6
  TOP w0.254: v1(11,39.1) 4.9,39.1 3.88,38.08 D12.2 D6.2 D13.2 D7.2 ; R54.2 31.04,53.1 v1(11,53.1)
  BOTTOM w0.254: v1(11,39.1) v1(11,53.1)
N16838681: length 43.1
  TOP w0.254: v1(10.2,53.9) 30.34,53.9 R55.2 ; D5.2 D11.2 D4.2 D10.2 3.88,46.58 4.9,47.6 v1(10.2,47.6)
  BOTTOM w0.254: v1(10.2,47.6) v1(10.2,53.9)
N16838688: length 38.3
  TOP w0.254: R56.2 29.44,54.6 10,54.6 8.2,56.4 4.9,56.4 3.88,55.38 D8.2 D2.2 D9.2 D3.2
N16857523: length 5.3
  TOP w0.508: R20.1 v1(15,29.1) C23.1 ; v1(17,29.1) R21.1
  BOTTOM w0.508: v1(15,29.1) v1(17,29.1)
N16857564: length 5.3
  TOP w0.508: C25.1 v1(13.5,29.1) R25.1 ; v1(11.5,29.1) R23.1
  BOTTOM w0.508: v1(13.5,29.1) v1(11.5,29.1)
N16859623: length 5.3
  TOP w0.508: R18.1 v1(30,29.1) C24.1 ; v1(28,29.1) R22.1
  BOTTOM w0.508: v1(30,29.1) v1(28,29.1)
N16859644: length 5.3
  TOP w0.508: C22.1 v1(31.5,29.1) R26.1 ; v1(33.5,29.1) R24.1
  BOTTOM w0.508: v1(31.5,29.1) v1(33.5,29.1)
N16860087: length 5.3
  TOP w0.508: C30.1 v1(48,29.1) R32.1 ; v1(50,29.1) R34.1
  BOTTOM w0.508: v1(48,29.1) v1(50,29.1)
N16860108: length 5.3
  TOP w0.508: C32.1 v1(46.5,29.1) R40.1 ; v1(44.5,29.1) R38.1
  BOTTOM w0.508: v1(46.5,29.1) v1(44.5,29.1)
N16860576: length 5.3
  TOP w0.508: v1(61,29.1) R36.1 ; R35.1 v1(63,29.1) C31.1
  BOTTOM w0.508: v1(63,29.1) v1(61,29.1)
N16860597: length 5.3
  TOP w0.508: C33.1 v1(64.5,29.1) R41.1 ; v1(66.5,29.1) R39.1
  BOTTOM w0.508: v1(64.5,29.1) v1(66.5,29.1)
N16861090: length 5.3
  TOP w0.508: v1(83,29.1) R47.1 ; C38.1 v1(81,29.1) R46.1
  BOTTOM w0.508: v1(81,29.1) v1(83,29.1)
N16861111: length 5.3
  TOP w0.508: R49.1 v1(79.5,29.1) C39.1 ; v1(77.5,29.1) R48.1
  BOTTOM w0.508: v1(79.5,29.1) v1(77.5,29.1)
N16862095: length 3.9
  TOP w0.254: R59.1 39.56,83.1 C64.1 40.96,83.14 41.45,82.65 U9.4
N16862099: length 3.8
  TOP w0.254: R58.1 39.56,84.7 C64.2 41.06,84.66 41.45,85.05 U9.3
N16864237: length 2.1
  TOP w0.203: C1.1 66.36,77.12 66.36,78.9
N16864239: length 2.1
  TOP w0.203: C5.2 71.44,77.1 U1.5
N16864245: length 4
  TOP w0.203: C5.1 70.17,76.37 U1.4
N16864247: length 9.7
  TOP w0.203: C1.2 66.1,73.8 66.5,73.4 68.4,73.4 68.89,73.89 U1.3
N16864249: length 6
  TOP w0.203: J2.3 70.17,86.05 U1.13
N16864255: length 5.4
  TOP w0.203: U1.14 68.89,87.55 J2.2
N16864267: length 2
  TOP w0.203: C3.2 72.7,76.87 U1.6
